# Altium PCB stm32h755xih3.PcbDoc
Units mm, origin at the board's own origin, x right, y up, seen from the top; angles counter-clockwise.
Board outline 152.4 x 101.6 mm, 20 copper layers (F.Cu, F.Mask, B.Cu, B.Mask, In1.Cu, F.SilkS, In2.Cu, B.SilkS, F.Adhes, B.Adhes, F.Paste, B.Paste, Dwgs.User, Cmts.User, Eco1.User, Eco2.User, Edge.Cuts, Margin, B.CrtYd, F.CrtYd); 69 components, 203 nets, 432 pads, 74 vias.
Unrouted connection lines stored in the file: 83.
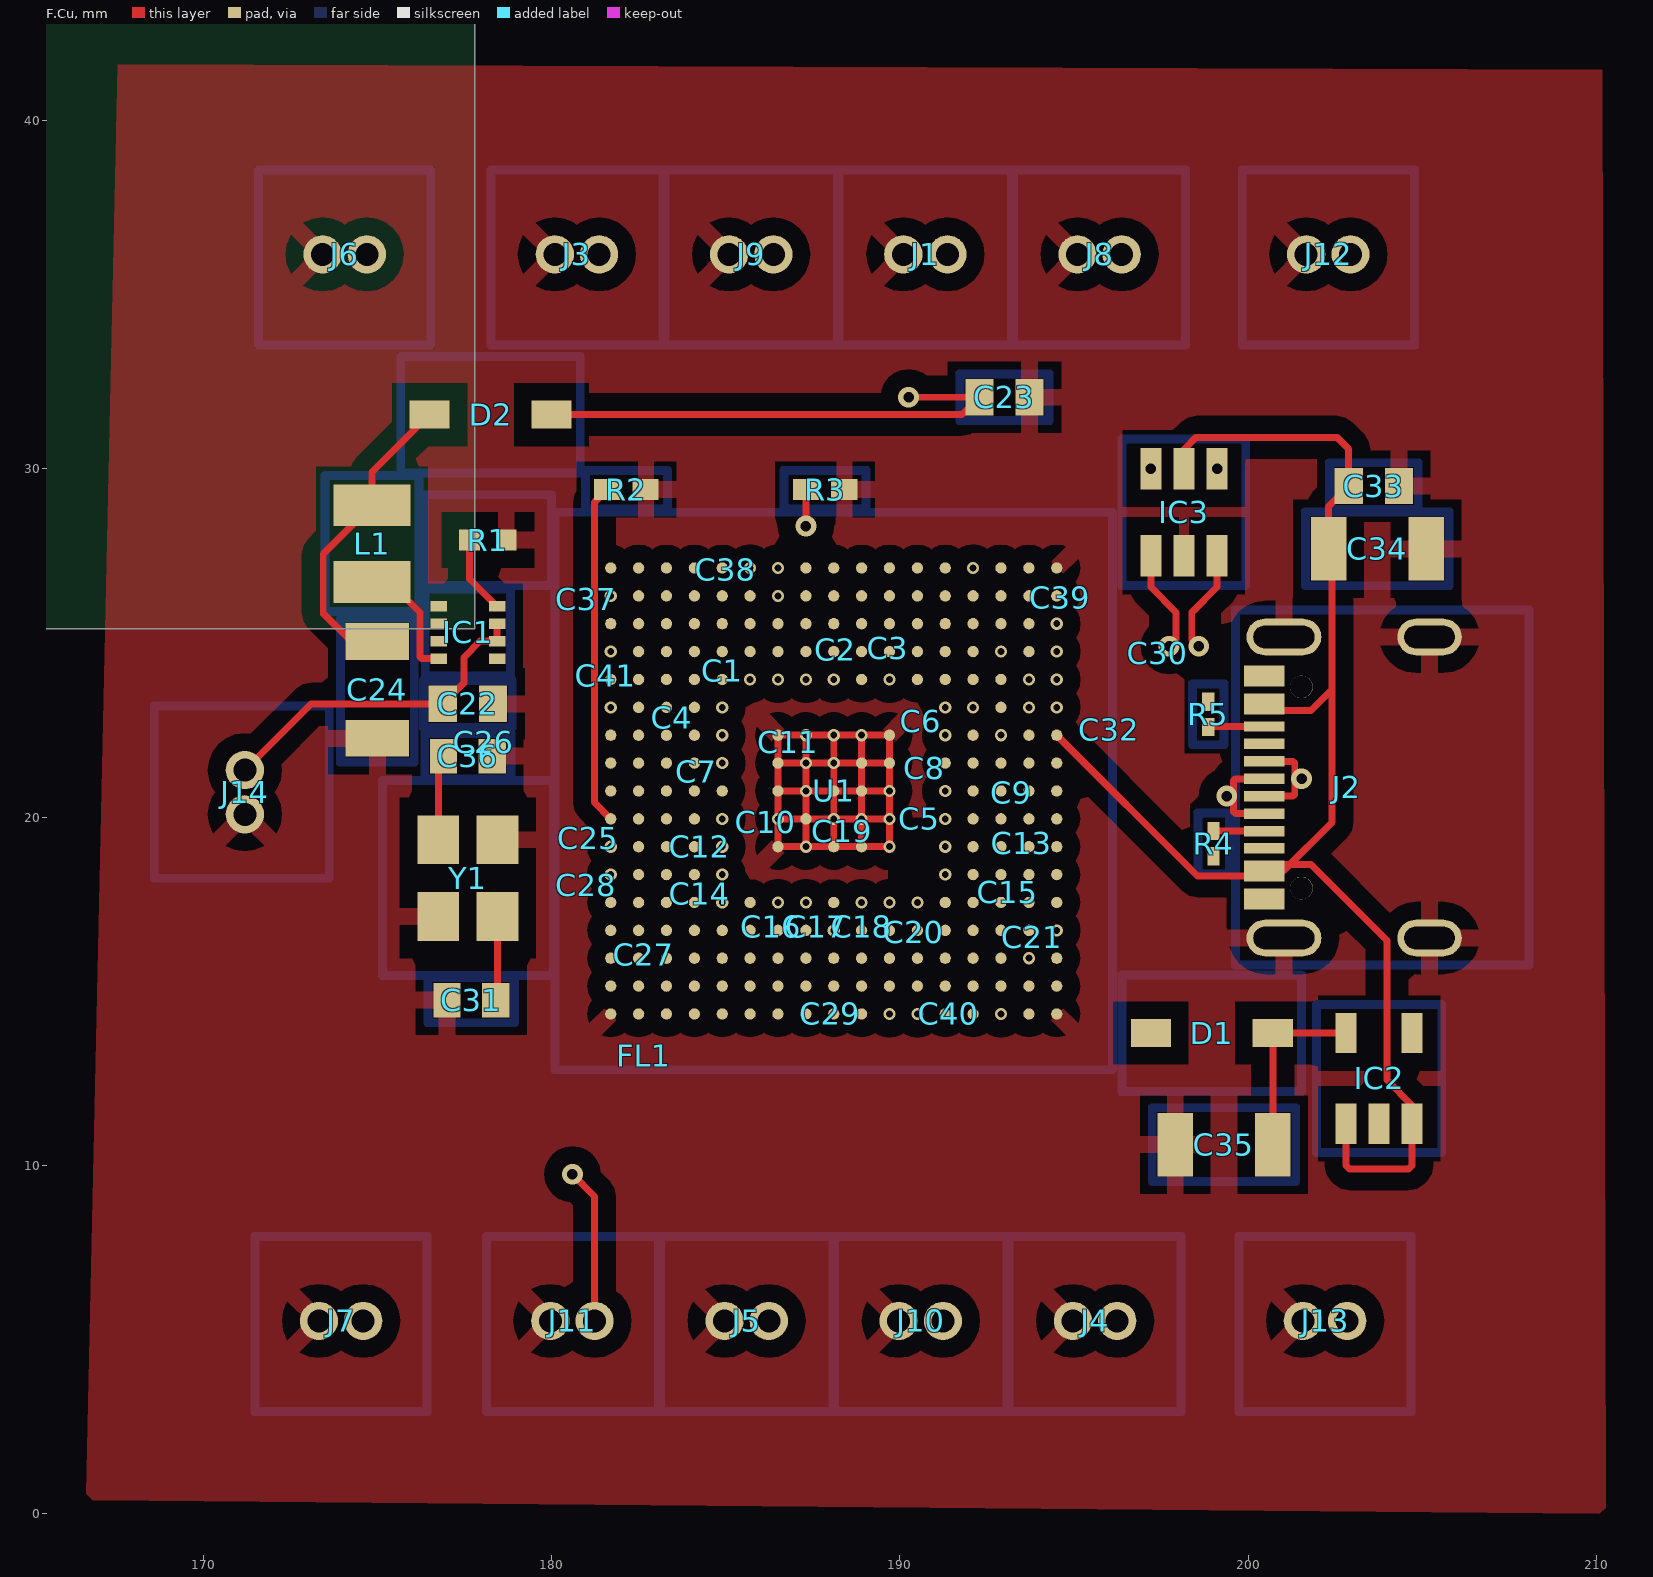
[diagram p0: F.Cu view]
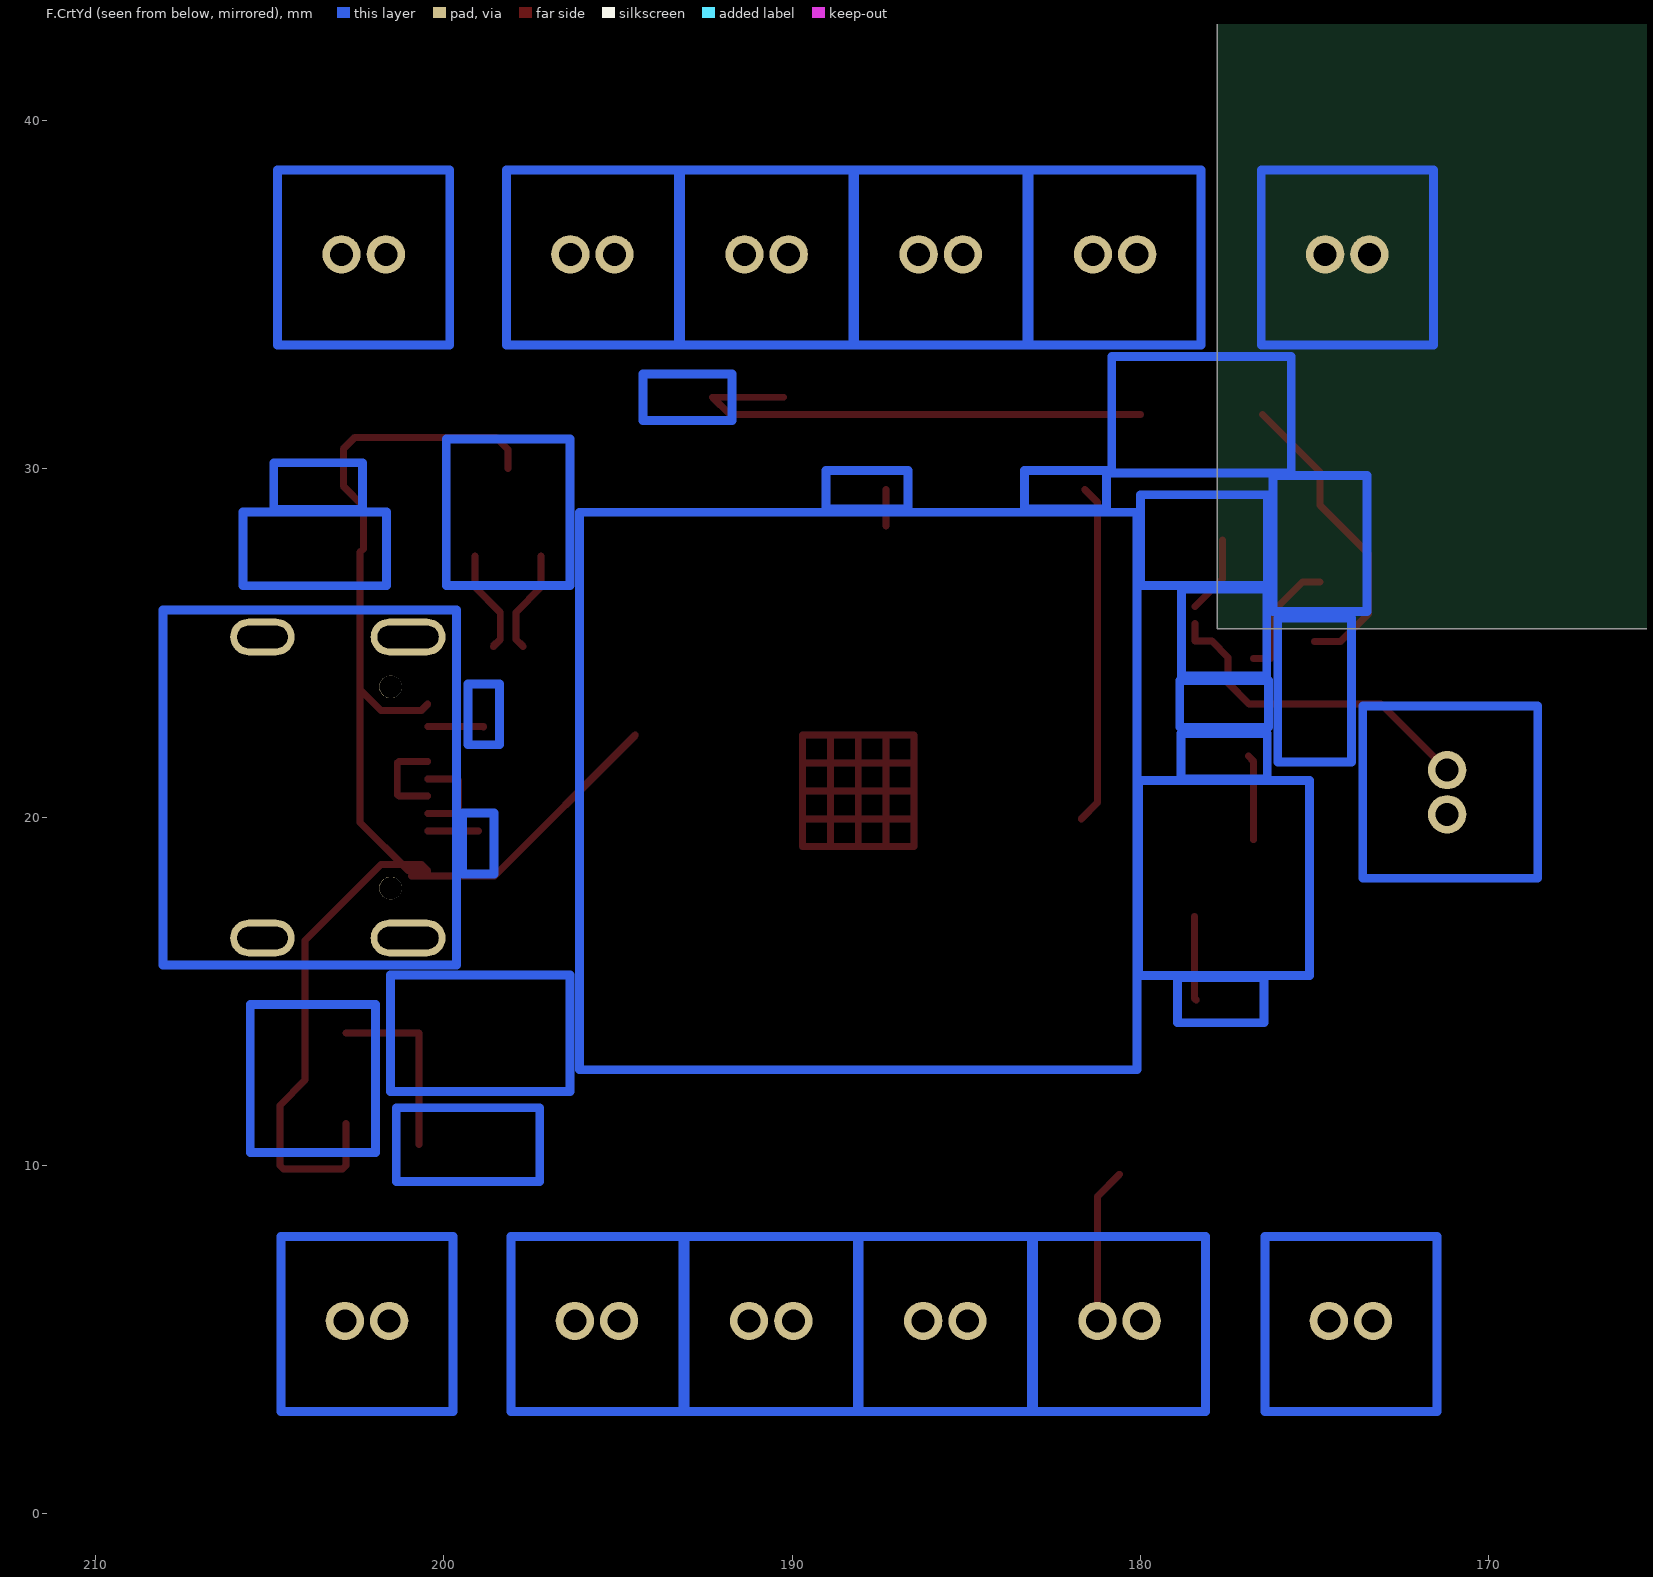
[diagram p1: F.CrtYd view, seen from below]
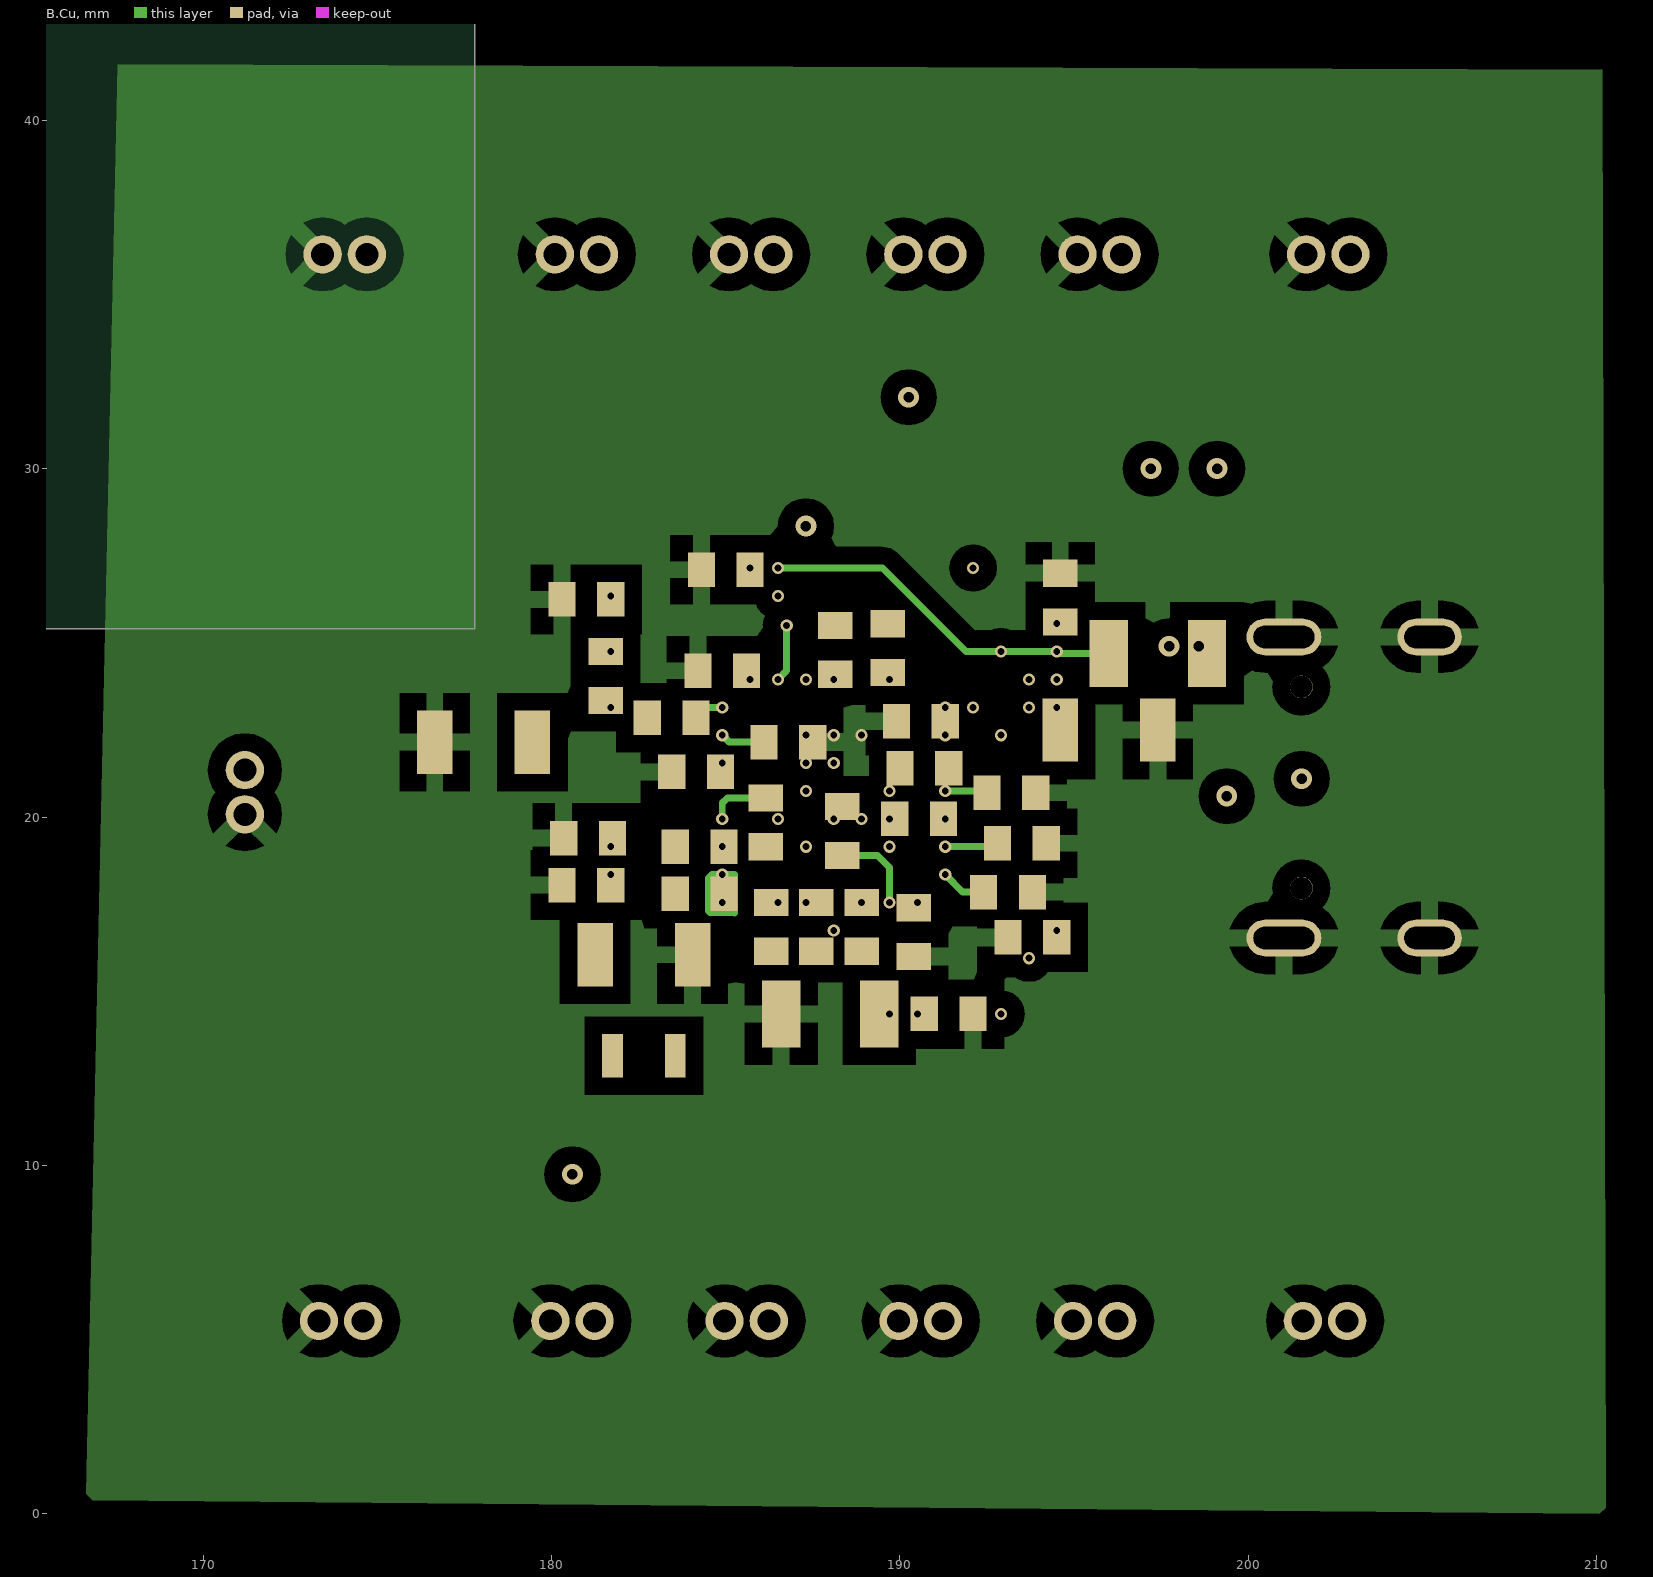
[diagram p2: B.Cu]
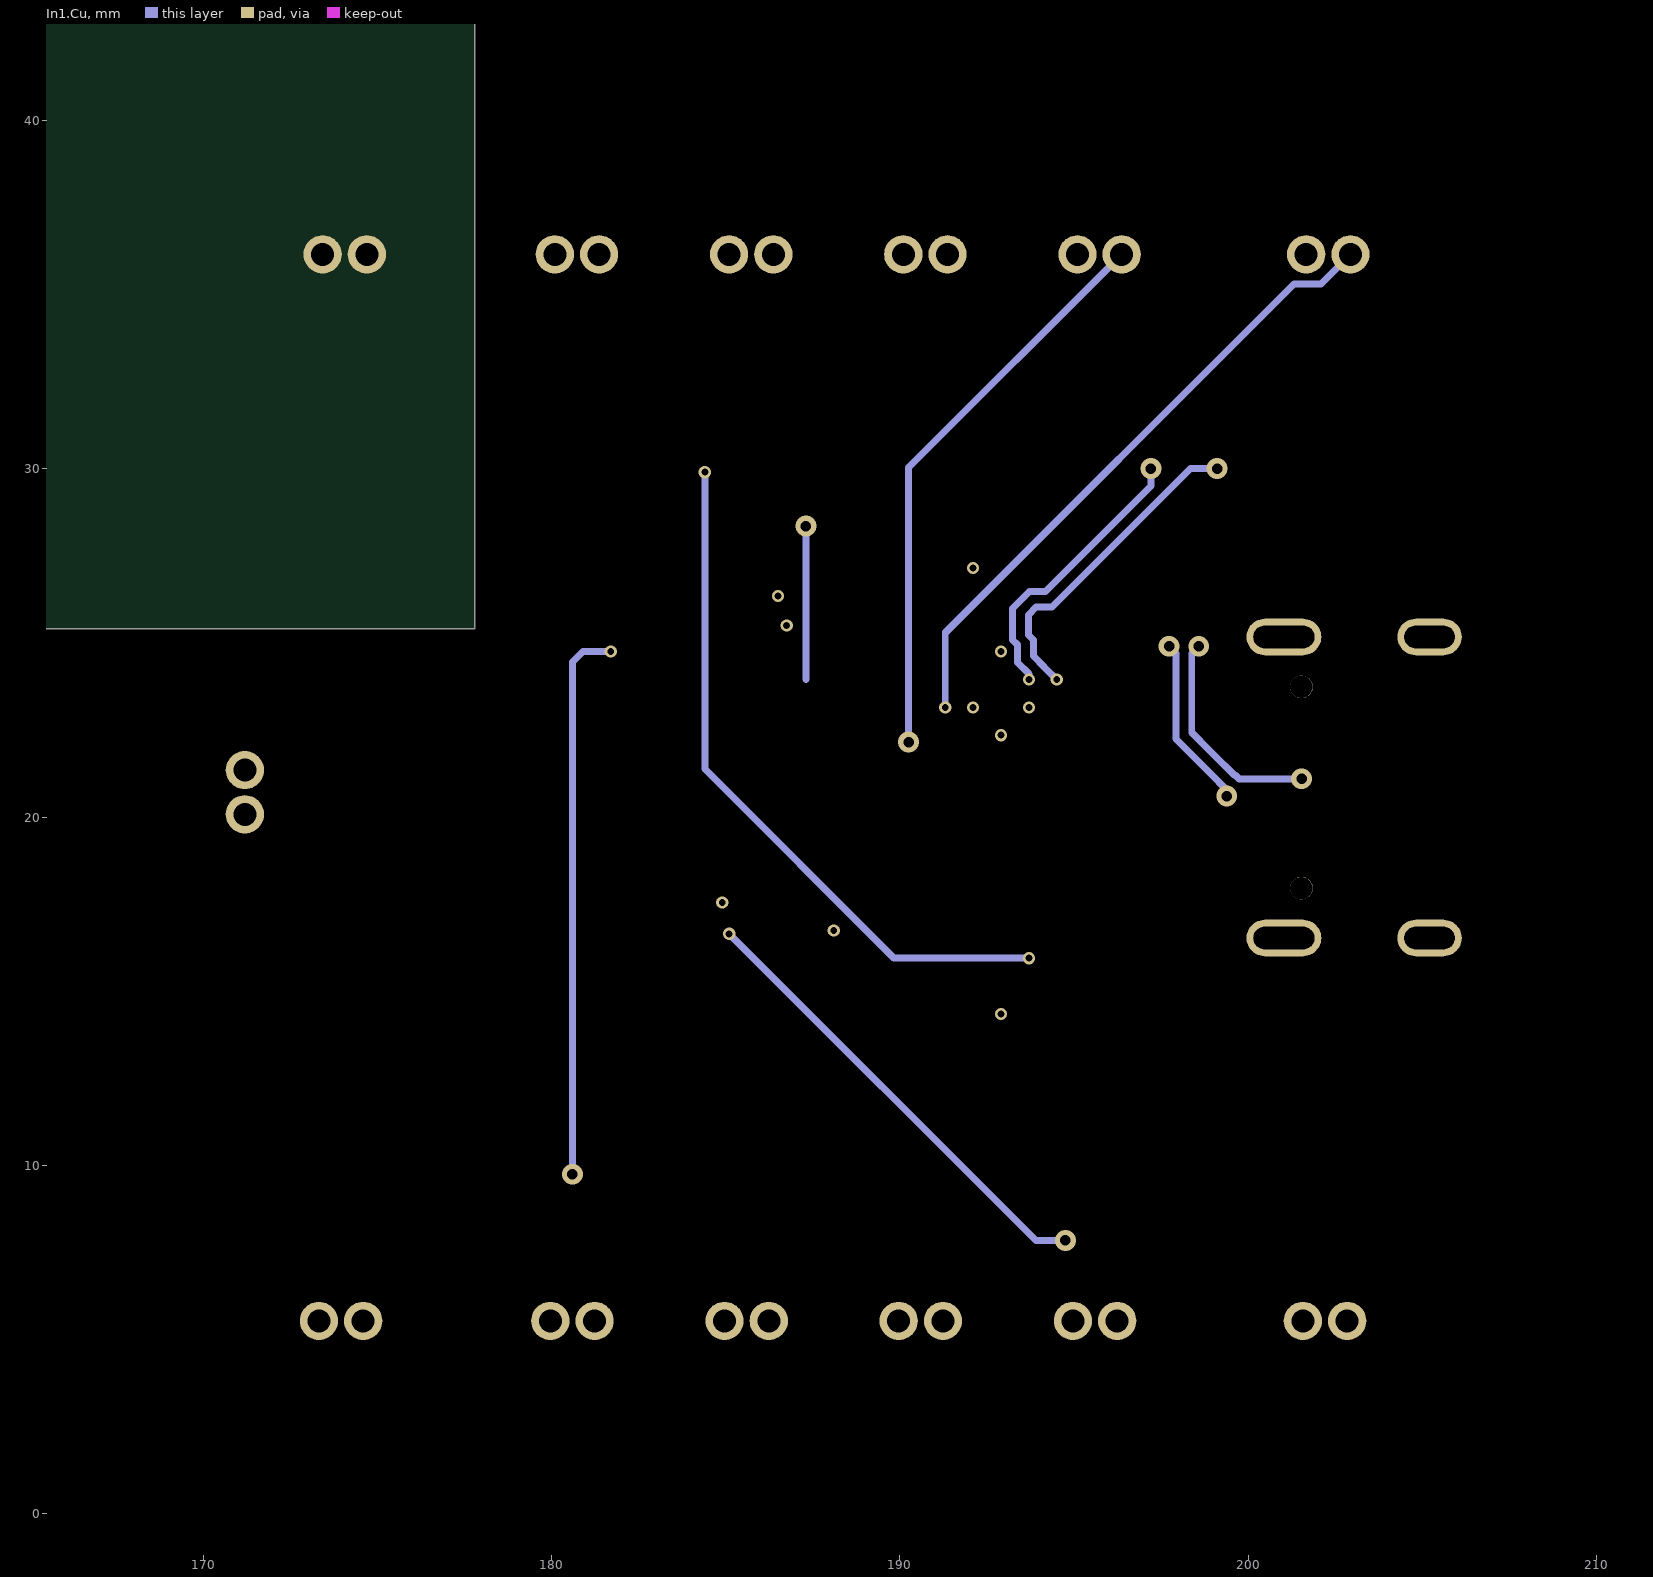
[diagram p3: In1.Cu]
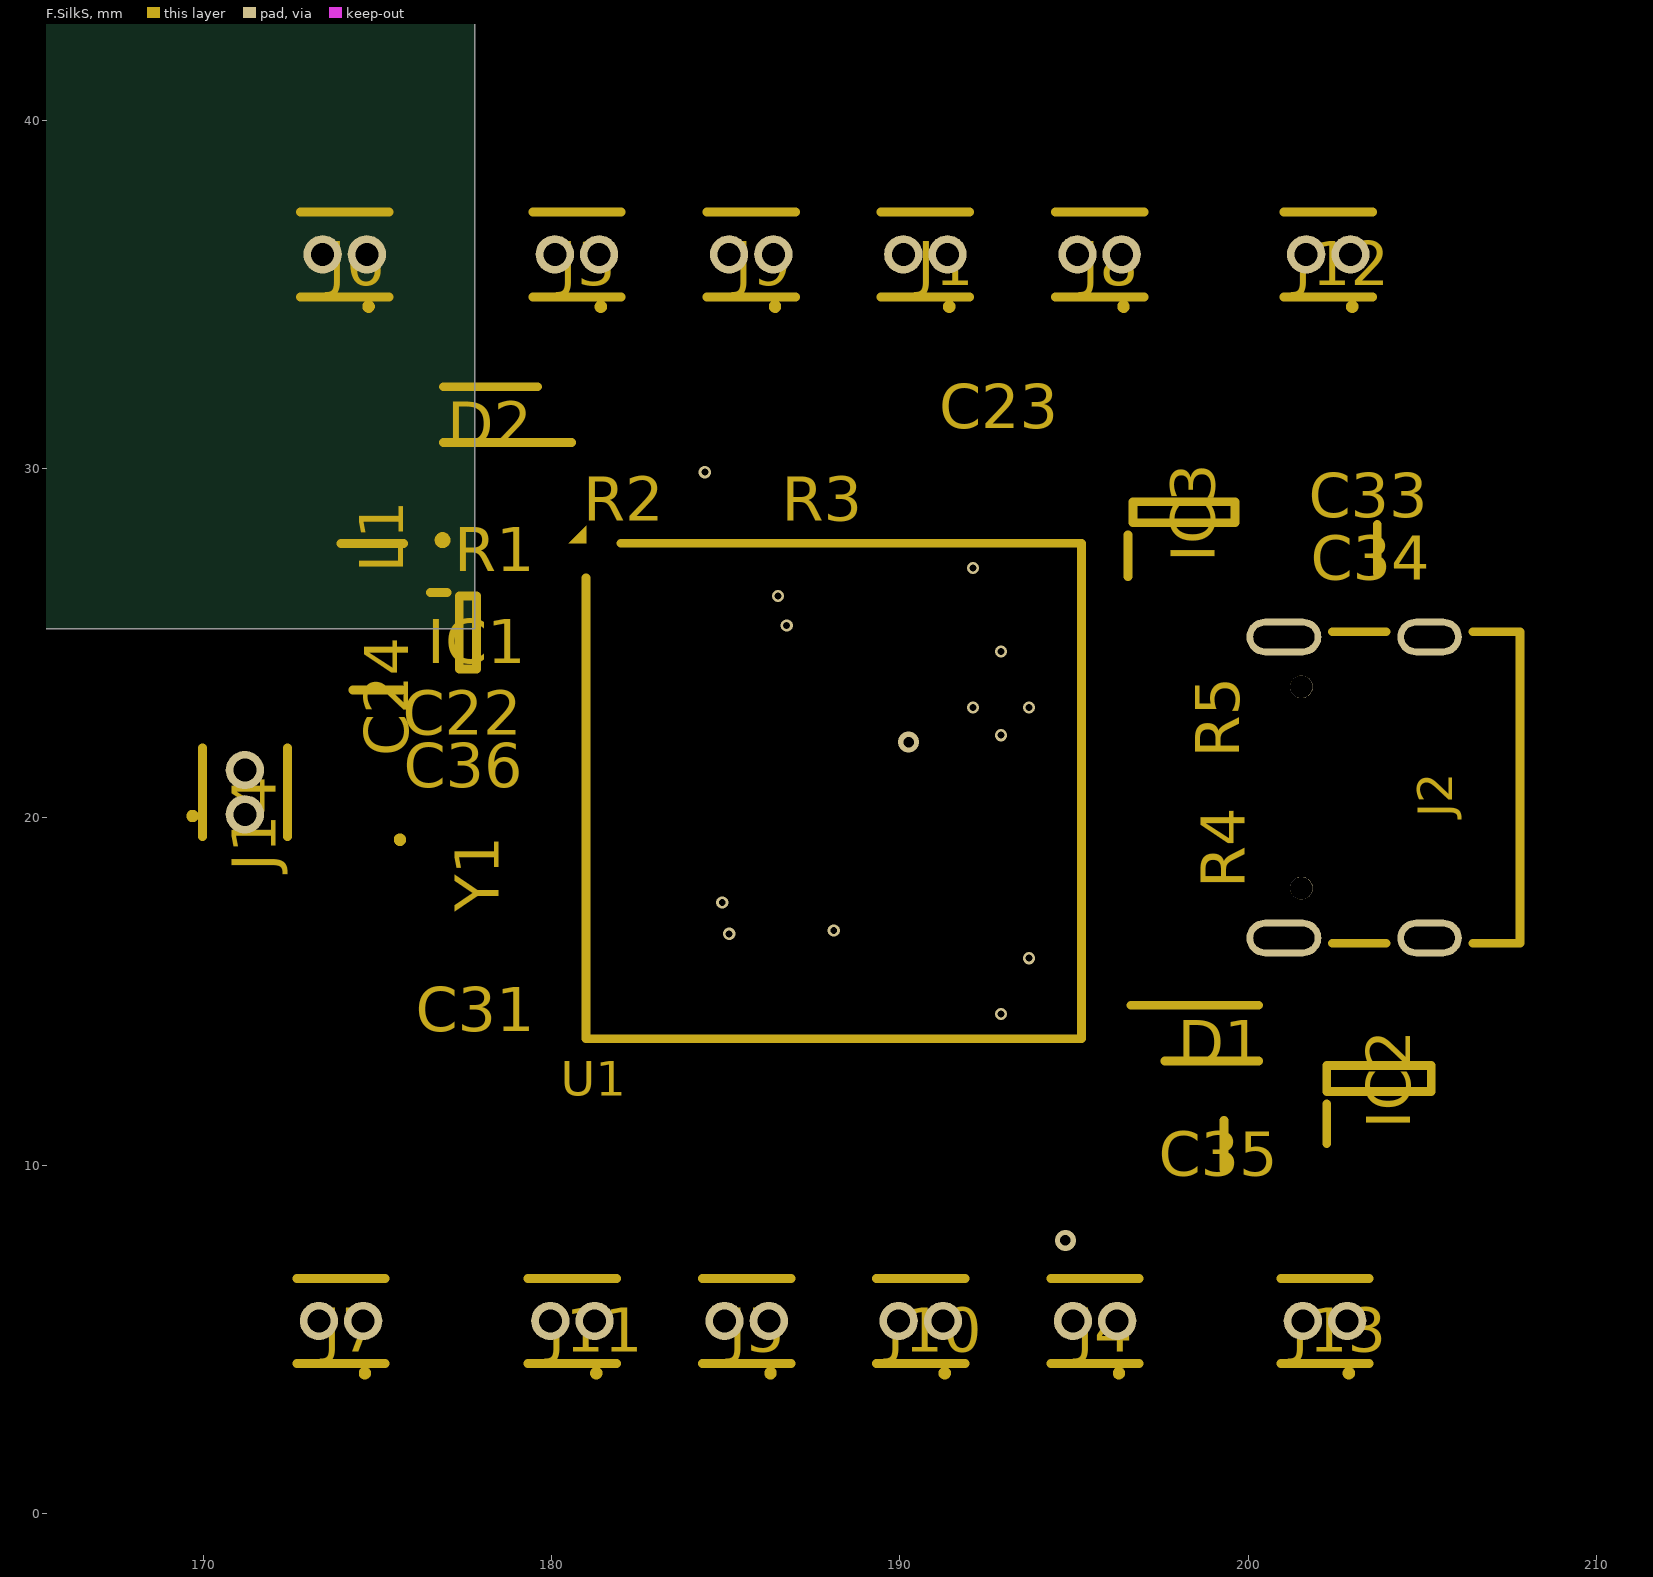
[diagram p4: F.SilkS]
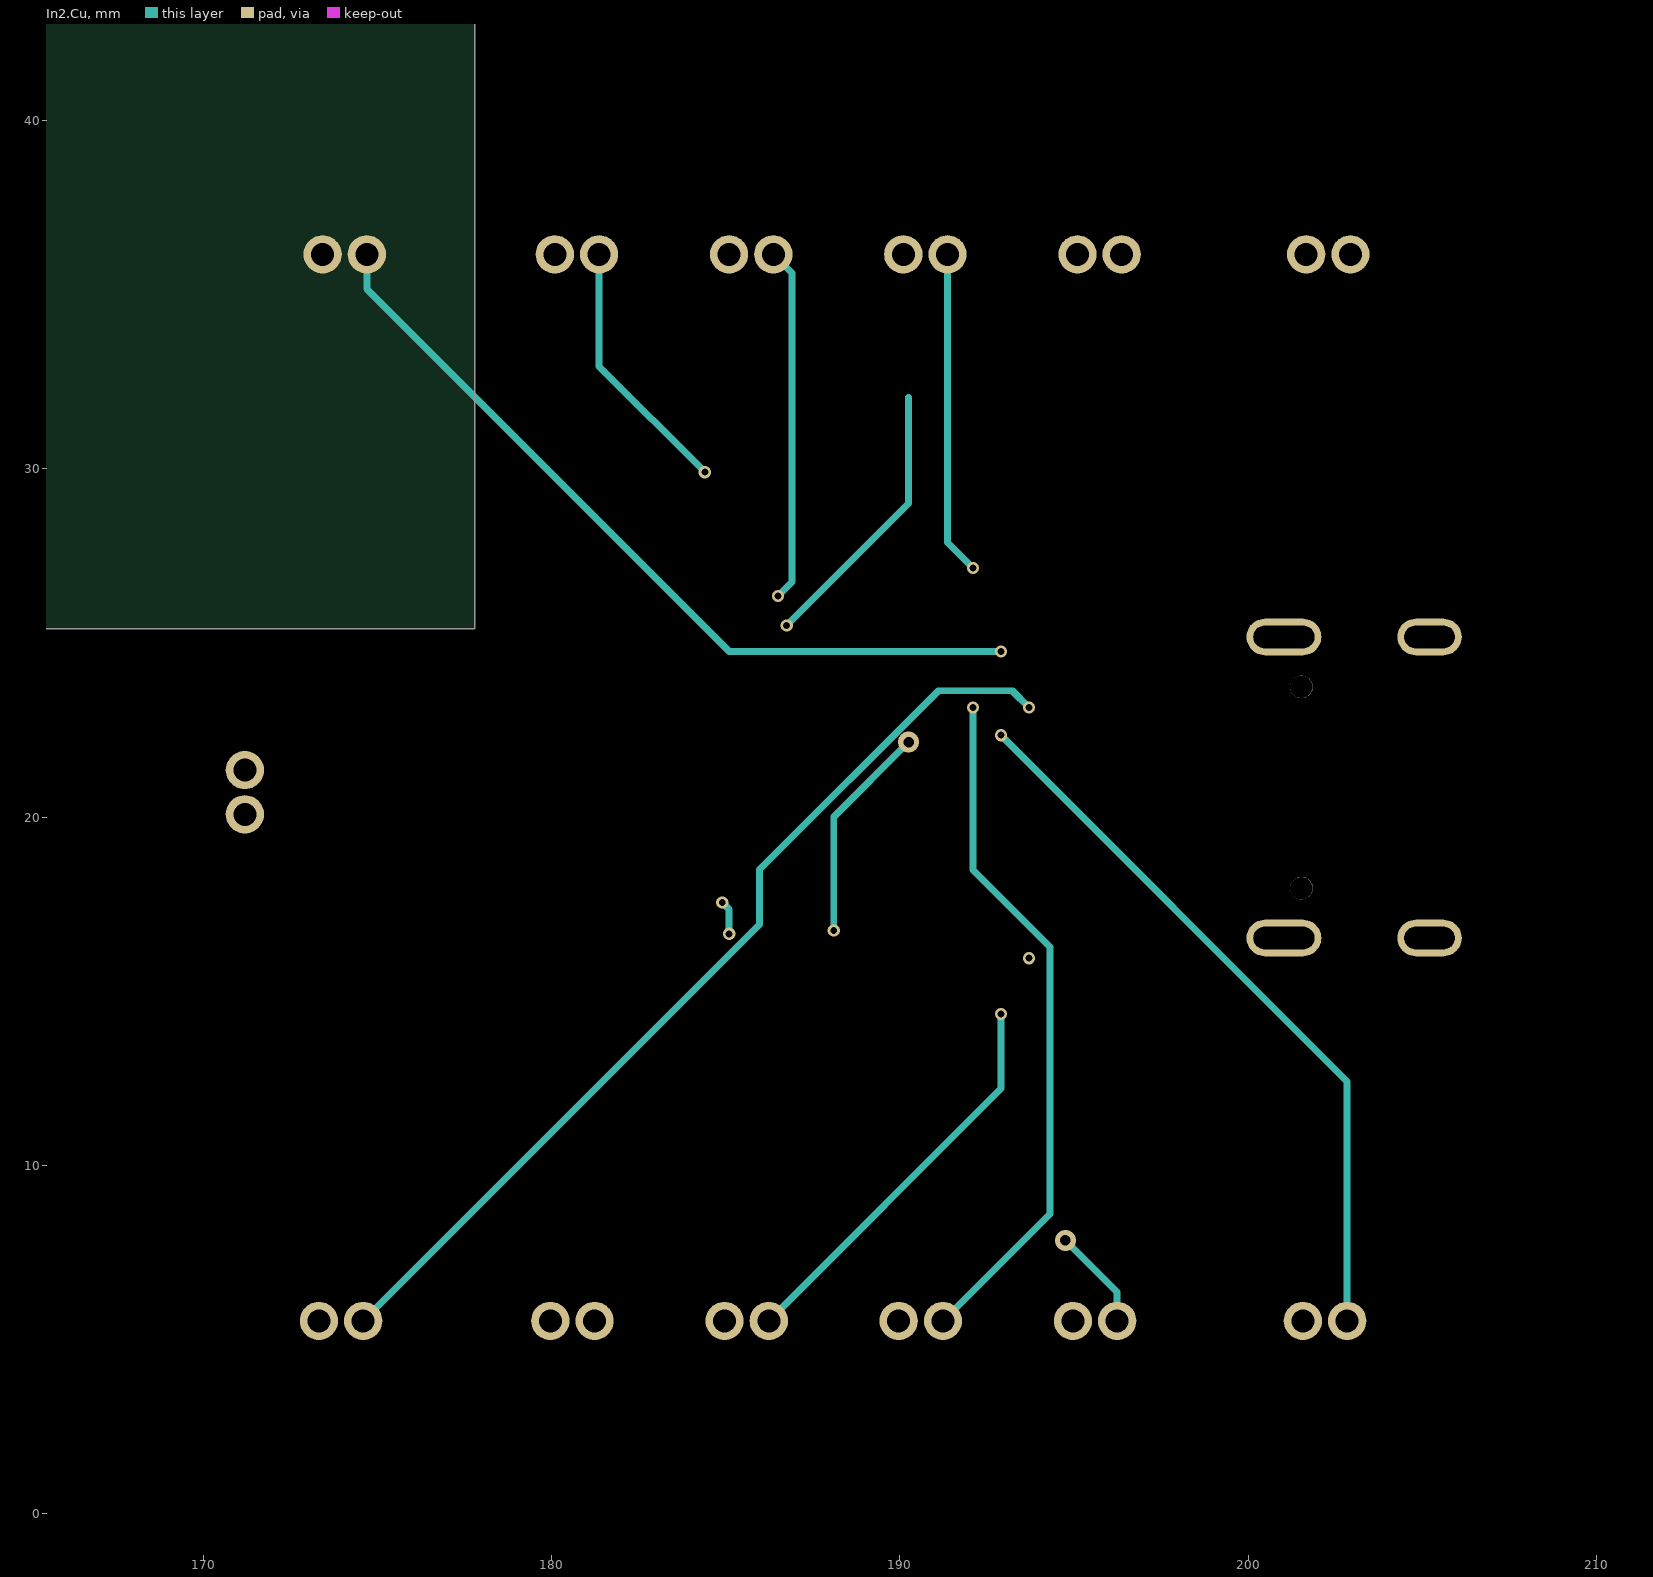
[diagram p5: In2.Cu]
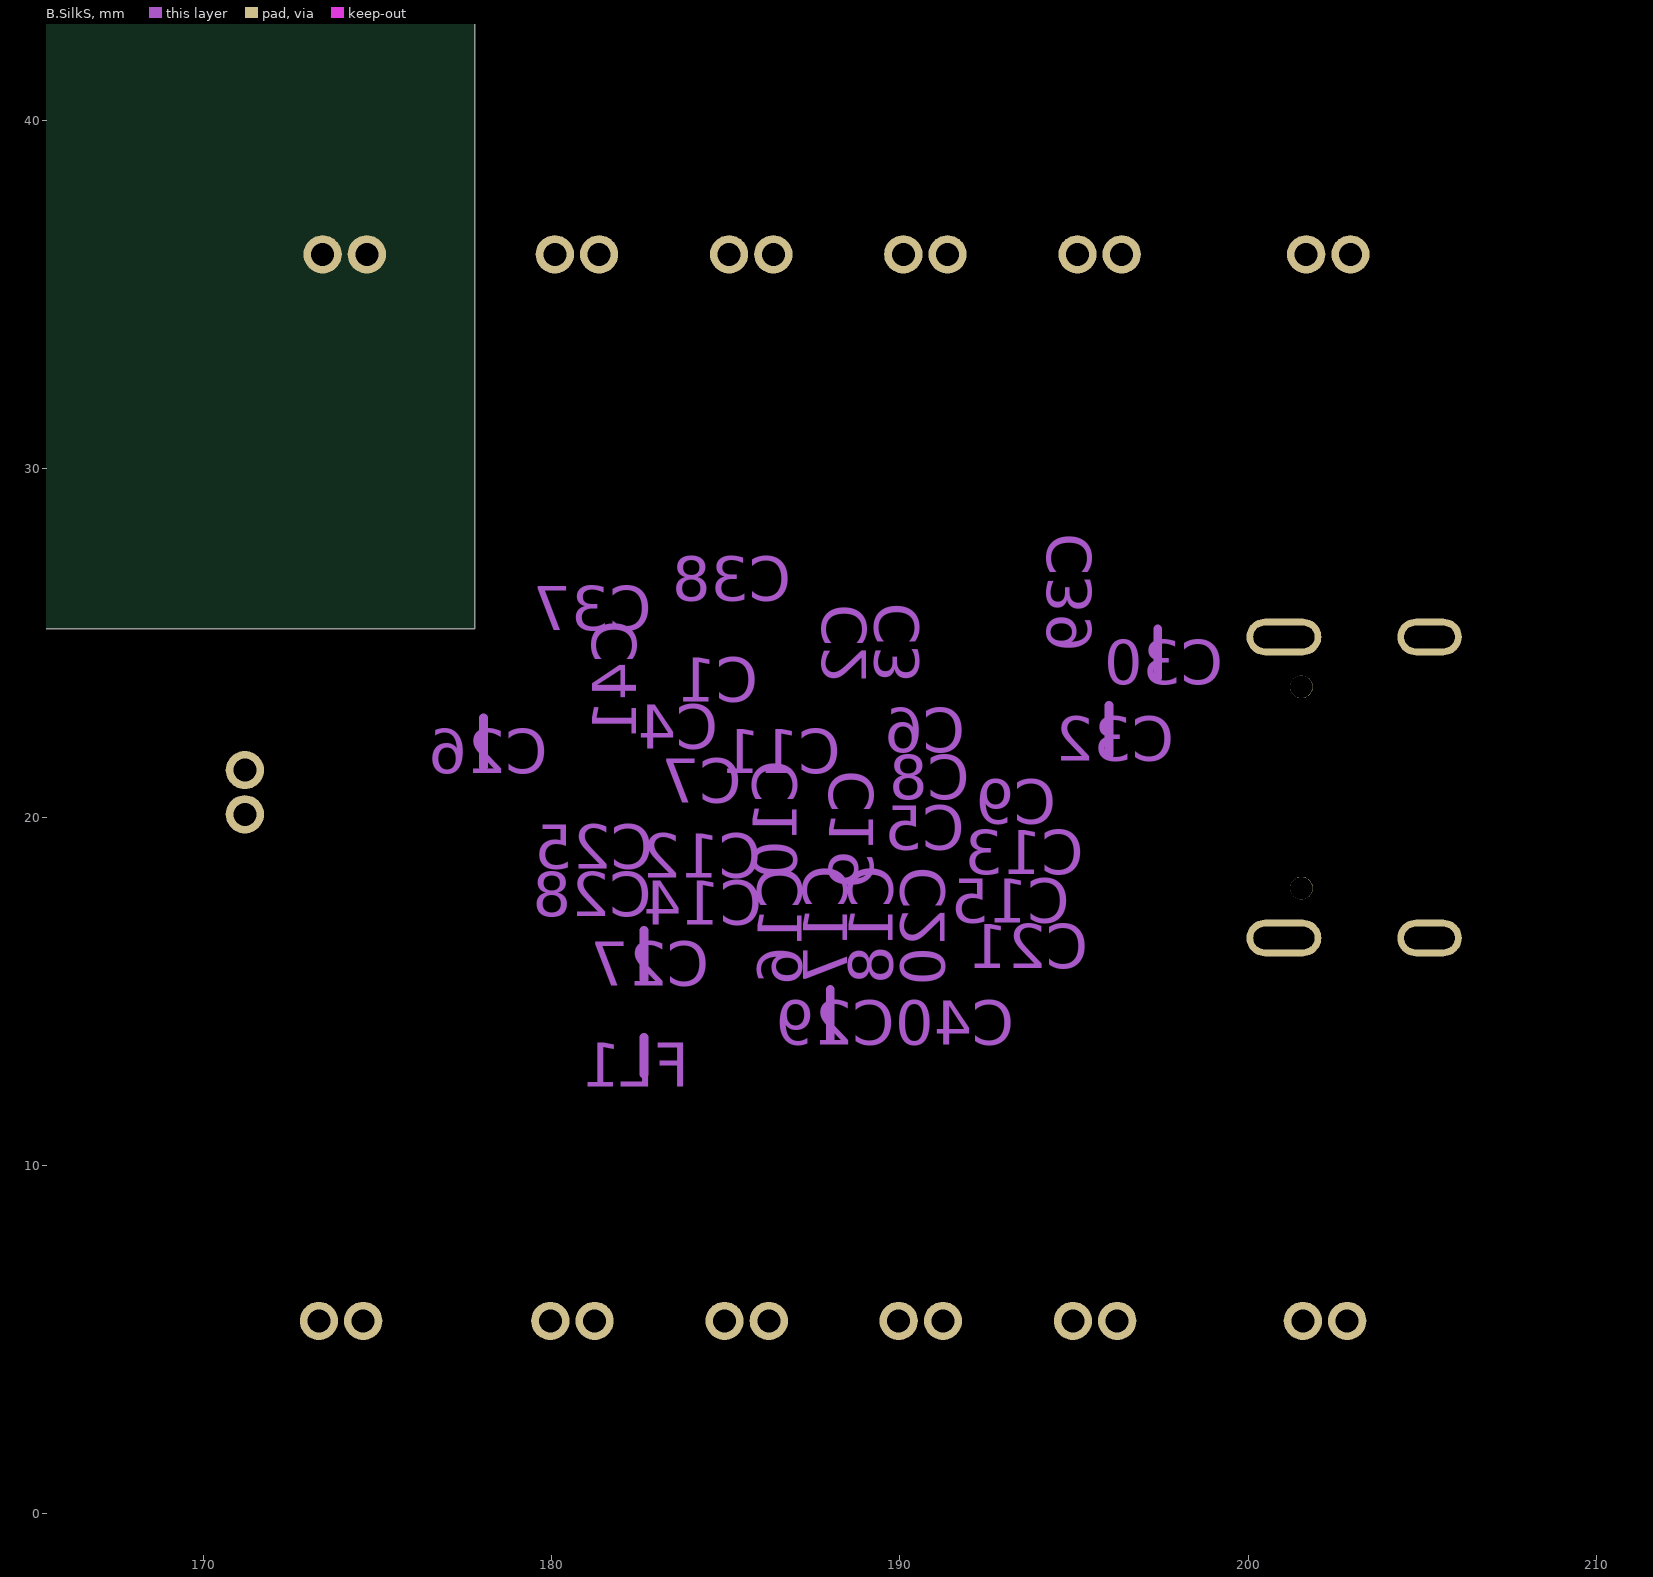
[diagram p6: B.SilkS]
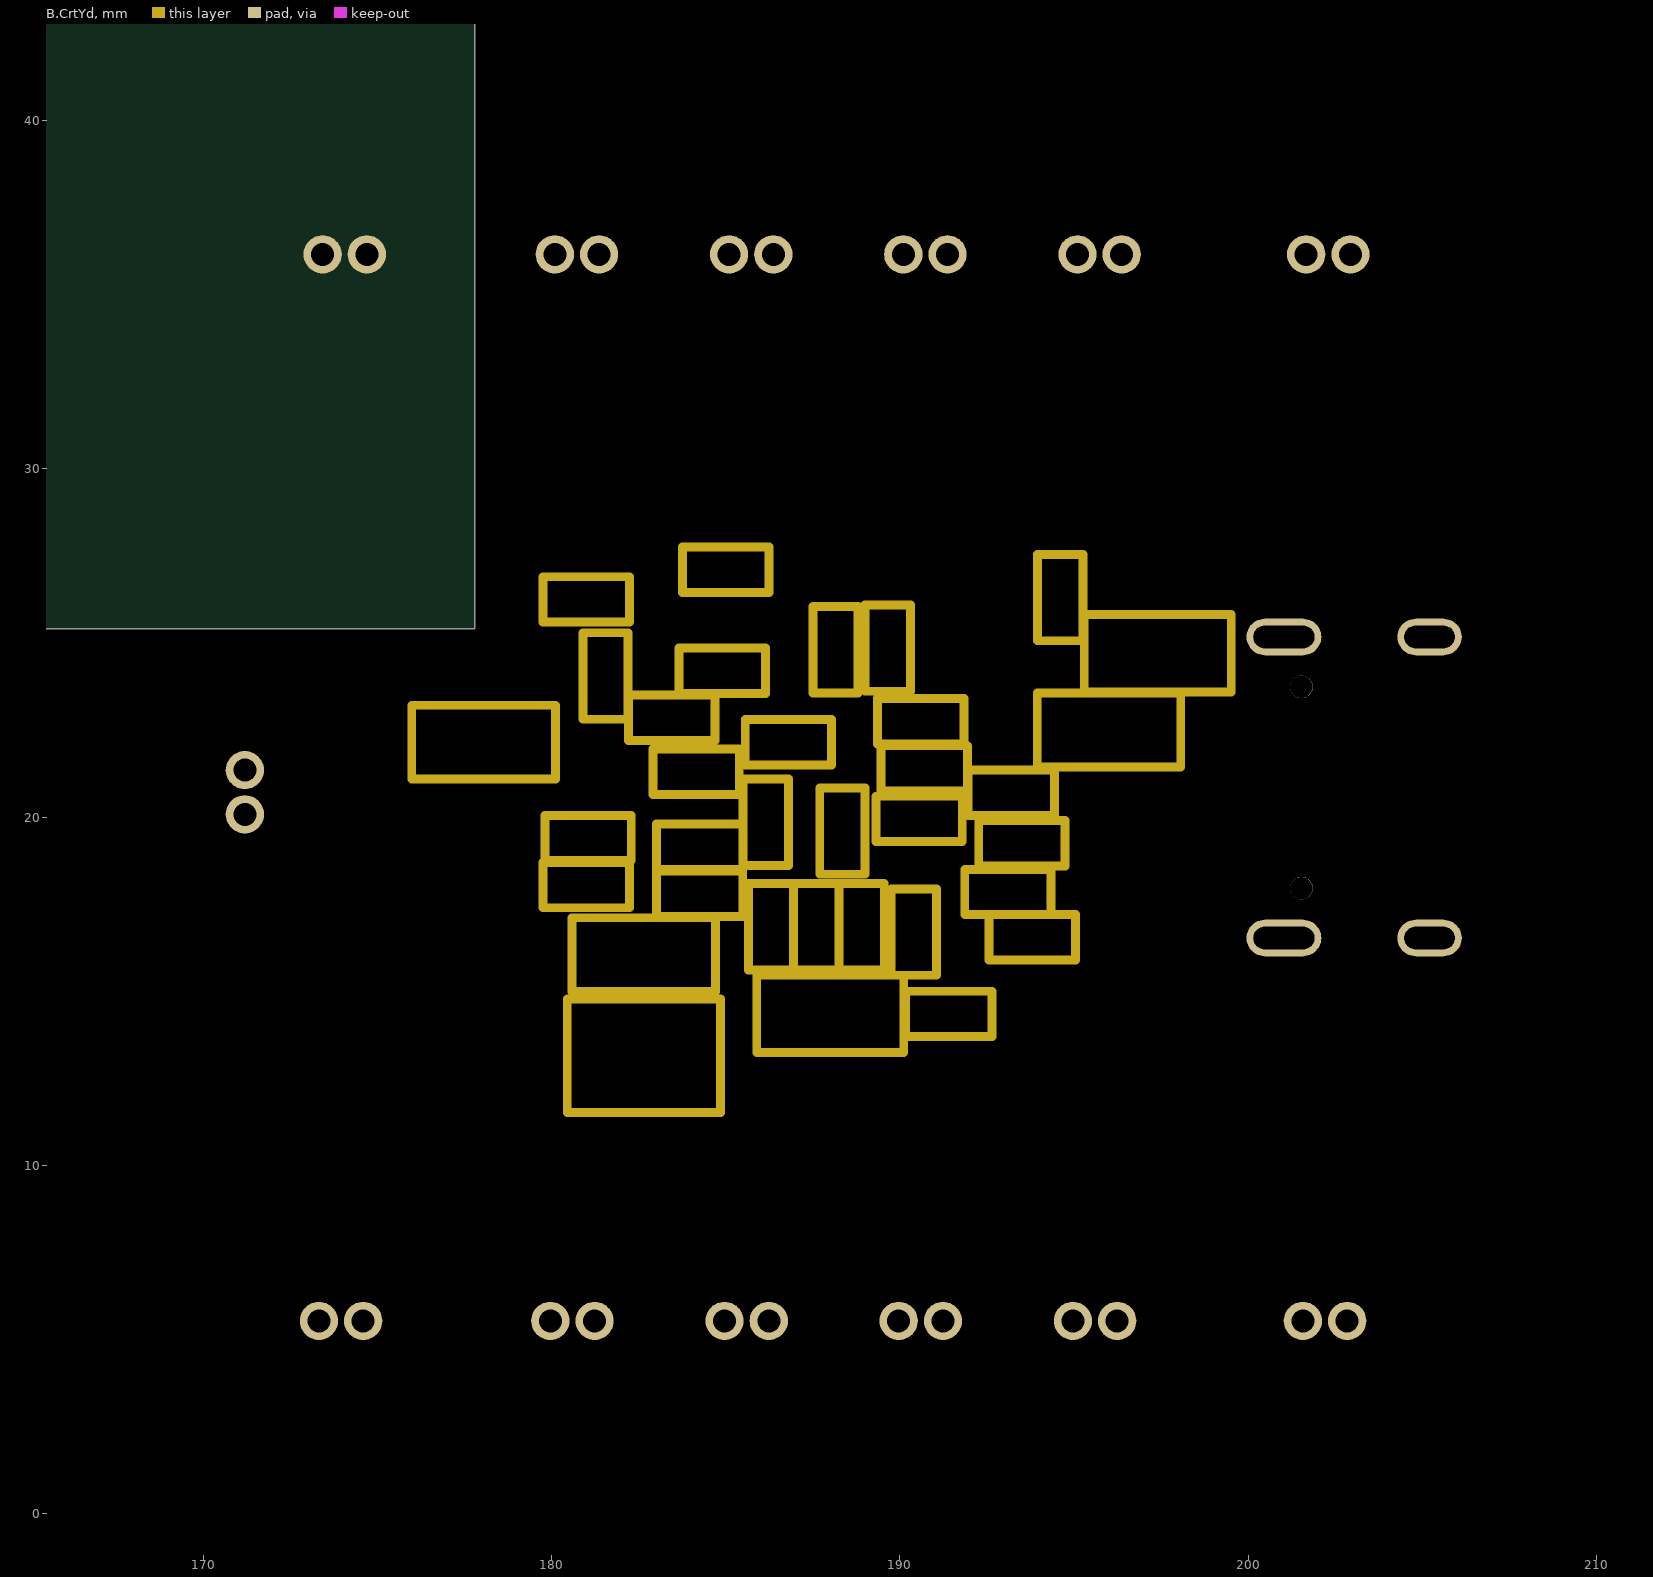
[diagram p7: B.CrtYd]

## Layer stack, top to bottom
Top Solder: solder mask 0.0102, Solder Resist, Dk 3.5
F.Cu: signal copper 0.0356
Dielectric 1: dielectric 0.32, FR-4, Dk 4.8
F.Mask: signal copper 0.0356
Dielectric2: dielectric 0.32, FR-4, Dk 4.8
B.Cu: signal copper 0.0356
Dielectric3: dielectric 0.32, FR-4, Dk 4.8
B.Mask: signal copper 0.0356
Dielectric4: dielectric 0.32, FR-4, Dk 4.8
In1.Cu: signal copper 0.0356
Dielectric5: dielectric 0.32, FR-4, Dk 4.8
F.SilkS: signal copper 0.0356
Dielectric6: dielectric 0.32, FR-4, Dk 4.8
In2.Cu: signal copper 0.0356
Dielectric7: dielectric 0.32, FR-4, Dk 4.8
B.SilkS: signal copper 0.0356
Dielectric8: dielectric 0.32, FR-4, Dk 4.8
F.Adhes: signal copper 0.0356
Dielectric9: dielectric 0.32, FR-4, Dk 4.8
B.Adhes: signal copper 0.0356
Dielectric10: dielectric 0.32, FR-4, Dk 4.8
F.Paste: signal copper 0.0356
Dielectric11: dielectric 0.32, FR-4, Dk 4.8
B.Paste: signal copper 0.0356
Dielectric12: dielectric 0.32, FR-4, Dk 4.8
Dwgs.User: signal copper 0.0356
Dielectric13: dielectric 0.32, FR-4, Dk 4.8
Cmts.User: signal copper 0.0356
Dielectric14: dielectric 0.32, FR-4, Dk 4.8
Eco1.User: signal copper 0.0356
Dielectric15: dielectric 0.32, FR-4, Dk 4.8
Eco2.User: signal copper 0.0356
Dielectric16: dielectric 0.32, FR-4, Dk 4.8
Edge.Cuts: signal copper 0.0356
Dielectric17: dielectric 0.32, FR-4, Dk 4.8
Margin: signal copper 0.0356
Dielectric18: dielectric 0.32, FR-4, Dk 4.8
B.CrtYd: signal copper 0.0356
Dielectric19: dielectric 0.32, FR-4, Dk 4.8
F.CrtYd: signal copper 0.0356
Bottom Solder: solder mask 0.0102, Solder Resist, Dk 3.5

## Board outline
25.4,25.4 177.8,25.4 177.8,127 25.4,127

## Design rules (kind name [scope] priority, off if disabled: settings)
Clearance "Clearence 0.5_Polygon" [InNamedPolygon('F.Cu-GND') OR InNamedPolygon('B.Cu-GND')] p1: gap=0.5 ignorepadtopadclearanceinfootprint=FALSE
MinimumSolderMaskSliver [All] p1: minsoldermaskwidth=0
PolygonConnect Polygon_B.Cu-GND_ConnectDirect [IsNamedPolygon('B.Cu-GND') vs IsVia] p1: connectstyle=Direct reliefconductorwidth=0.254 reliefentries=4 polygonreliefangle="90 Angle" airgapwidth=0.254
PolygonConnect Polygon_B.Cu-GND_ConnectRelief45 [IsNamedPolygon('B.Cu-GND') vs (IsThruPin or IsSMTPin) and (PadShape_AllLayers = 'Round')] p2: connectstyle=Relief reliefconductorwidth=0.5 reliefentries=4 polygonreliefangle="45 Angle" airgapwidth=0.5
PolygonConnect Polygon_B.Cu-GND_ConnectRelief90 [IsNamedPolygon('B.Cu-GND') vs (IsThruPin or IsSMTPin) and (PadShape_AllLayers <> 'Round')] p3: connectstyle=Relief reliefconductorwidth=0.5 reliefentries=4 polygonreliefangle="90 Angle" airgapwidth=0.5
PolygonConnect Polygon_F.Cu-GND_ConnectDirect [IsNamedPolygon('F.Cu-GND') vs IsVia] p4: connectstyle=Direct reliefconductorwidth=0.254 reliefentries=4 polygonreliefangle="90 Angle" airgapwidth=0.254
PolygonConnect Polygon_F.Cu-GND_ConnectRelief45 [IsNamedPolygon('F.Cu-GND') vs (IsThruPin or IsSMTPin) and (PadShape_AllLayers = 'Round')] p5: connectstyle=Relief reliefconductorwidth=0.5 reliefentries=4 polygonreliefangle="45 Angle" airgapwidth=0.5
PolygonConnect Polygon_F.Cu-GND_ConnectRelief90 [IsNamedPolygon('F.Cu-GND') vs (IsThruPin or IsSMTPin) and (PadShape_AllLayers <> 'Round')] p6: connectstyle=Relief reliefconductorwidth=0.5 reliefentries=4 polygonreliefangle="90 Angle" airgapwidth=0.5
RoutingVias [All] p1: holewidth=0.711 width=1.27 viastyle="Through Hole" minholewidth=0.711 minwidth=1.27 maxholewidth=0.711 maxwidth=1.27
SilkToSilkClearance [All] p1: silktosilkclearance=0
SilkToSolderMaskClearance [IsPad] p1: minsilkscreentomaskgap=0 clearancetoexposedcopper=TRUE
SolderMaskExpansion [All] p1: expansion=0.102 istentingtop=FALSE
Width [All] p1: maxlimit=10 minlimit=0.254 preferedwidth=0.254 midlayer1_maxwidth=0.254 midlayer3_maxwidth=0.254 midlayer9_maxwidth=0.254 midlayer11_maxwidth=0.254 midlayer13_maxwidth=0.254 midlayer15_maxwidth=0.254 midlayer17_maxwidth=0.254 midlayer19_maxwidth=0.254 midlayer21_maxwidth=0.254 midlayer23_maxwidth=0.254 midlayer25_maxwidth=0.254 midlayer27_maxwidth=0.254 minimp=50.000000 maximp=50.000000 favimp=50.000000
27 further rules are at their usual default settings.

## Components (designator, comment, footprint, x,y, rotation, side; value= is the part's Value field where it differs from the comment)
C1 "Comment" CAPC1608X90N#1 184.9,24.2 r180 top value=CC0603JRX7R9BB104
C2 "Comment" CAPC1608X90N#1 188.15,24.8 r90 top value=CC0603JRX7R9BB104
C3 "Comment" CAPC1608X90N#1 189.65,24.85 r90 top value=CC0603JRX7R9BB104
C4 "Comment" CAPC1608X90N#1 183.45,22.85 r180 top value=CC0603JRX7R9BB104
C5 "Comment" CAPC1608X90N#1 190.55,19.95 r180 top value=CC0603JRX7R9BB104
C6 "Comment" CAPC1608X90N#1 190.6,22.75 r180 top value=CC0603JRX7R9BB104
C7 "Comment" CAPC1608X90N#1 184.15,21.3 r180 top value=CC0603JRX7R9BB104
C8 "Comment" CAPC1608X90N#1 190.7,21.4 r180 top value=CC0603JRX7R9BB104
C9 "Comment" CAPC1608X90N#1 193.2,20.7 r0 top value=CC0603JRX7R9BB104
C10 "Comment" CAPC1608X90N#1 186.15,19.85 r270 top value=CC0603JRX7R9BB104
C11 "Comment" CAPC1608X90N#1 186.8,22.15 r0 top value=CC0603JRX7R9BB104
C12 "Comment" CAPC1608X90N#1 184.25,19.15 r180 top value=CC0603JRX7R9BB104
C13 "Comment" CAPC1608X90N#1 193.5,19.25 r0 top value=CC0603JRX7R9BB104
C14 "Comment" CAPC1608X90N#1 184.25,17.8 r180 top value=CC0603JRX7R9BB104
C15 "Comment" CAPC1608X90N#1 193.1,17.85 r0 top value=CC0603JRX7R9BB104
C16 "Comment" CAPC1608X90N#1 186.3,16.85 r270 top value=CC0603JRX7R9BB104
C17 "Comment" CAPC1608X90N#1 187.6,16.85 r270 top value=CC0603JRX7R9BB104
C18 "Comment" CAPC1608X90N#1 188.9,16.85 r270 top value=CC0603JRX7R9BB104
C19 "Comment" CAPC1608X90N#1 188.35,19.6 r90 top value=CC0603JRX7R9BB104
C20 "Comment" CAPC1608X90N#1 190.4,16.7 r270 top value=CC0603JRX7R9BB104
C21 "Comment" CAPC1608X90N#1 193.8,16.55 r180 top value=CC0603JRX7R9BB104
C22 "Comment" CAPC1709X100N 177.6,23.25 r0 top value=MLASG168BB5475KTNA01
C23 "Comment" CAPC1709X100N 193,32.05 r0 top value=MLASG168BB5475KTNA01
C24 "Comment" CAPC3216X95N 175,23.65 r270 top value=CL31A226KOCLNNC
C25 "Comment" CAPC1608X90N#1 181.05,19.4 r180 top value=CC0603JRX7R9BB104
C26 "Comment" CAPC3216X190N#1 178.05,22.15 r180 top value=KGM31HR71C105JU
C27 "Comment" CAPC3216X190N#1 182.65,16.05 r0 top value=KGM31HR71C105JU
C28 "Comment" CAPC1608X90N#1 181,18.05 r180 top value=CC0603JRX7R9BB104
C29 "Comment" CAPC3216X229N 188,14.35 r180 top value=12065C225JAT2A
C30 "Comment" CAPC3216X229N 197.4,24.7 r0 top value=12065C225JAT2A
C31 "Comment" CAPC1608X90N#2 177.7,14.75 r180 top value=06035C3R9CAT2A
C32 "Comment" CAPC3216X190N#1 196,22.5 r0 top value=KGM31HR71C105JU
C33 "Comment" CAPC1709X100N 203.6,29.5 r0 top value=MLASG168BB5475KTNA01
C34 "Comment" CAPC3216X190N#2 203.7,27.7 r0 top value=KGM31HR71C105JU
C35 "Comment" CAPC3216X190N#2 199.3,10.6 r180 top value=KGM31HR71C105JU
C36 "Comment" CAPC1608X90N#2 177.6,21.75 r0 top value=06035C3R9CAT2A
C37 "Comment" CAPC1608X90N#1 181,26.25 r180 top value=CC0603JRX7R9BB104
C38 "Comment" CAPC1608X90N#1 185,27.1 r180 top value=CC0603JRX7R9BB104
C39 "Comment" CAPC1608X90N#1 194.6,26.3 r90 top value=CC0603JRX7R9BB104
C40 "Comment" CAPC1608X90N#1 191.4,14.35 r0 top value=CC0603JRX7R9BB104
C41 "Comment" CAPC1608X90N#1 181.55,24.05 r90 top value=CC0603JRX7R9BB104
D1 "Comment" SOD3716X135N 198.95,13.8 r0 top value=MBR0530T1G
D2 "Comment" SOD3716X135N 178.25,31.55 r180 top value=MBR0530T1G
FL1 "Comment" BLM21AG102BH1J 182.65,13.15 r180 top value=BLM21AG601SN1D
IC1 "Comment" SOTFL50P160X60-8N 177.6,25.3 r0 top value=TPS629203QDRLRQ1
IC2 "Comment" SOT95P285X140-5N 203.75,12.5 r90 top value=AP2112K-3.3TRG1
IC3 "Comment" SOT95P280X145-6N 198.15,28.75 r90 top value=USBLC6-2SC6
J1 "Comment" TMS-102-YY-XX-S 191.365,36.15 r180 top value=TMS-102-21-G-S
J2 "Comment" AMPHENOL_10155435-00011LF 205.2,20.85 r90 top value=10155435-00011LF
J3 "Comment" TMS-102-YY-XX-S 181.365,36.15 r180 top value=TMS-102-21-G-S
J4 "Comment" TMS-102-YY-XX-S 196.235,5.54 r180 top value=TMS-102-21-G-S
J5 "Comment" TMS-102-YY-XX-S 186.235,5.54 r180 top value=TMS-102-21-G-S
J6 "Comment" TMS-102-YY-XX-S 174.7,36.15 r180 top value=TMS-102-21-G-S
J7 "Comment" TMS-102-YY-XX-S 174.595,5.54 r180 top value=TMS-102-21-G-S
J8 "Comment" TMS-102-YY-XX-S 196.365,36.15 r180 top value=TMS-102-21-G-S
J9 "Comment" TMS-102-YY-XX-S 186.365,36.15 r180 top value=TMS-102-21-G-S
J10 "Comment" TMS-102-YY-XX-S 191.235,5.54 r180 top value=TMS-102-21-G-S
J11 "Comment" TMS-102-YY-XX-S 181.235,5.54 r180 top value=TMS-102-21-G-S
J12 "Comment" TMS-102-YY-XX-S 202.93,36.15 r180 top value=TMS-102-21-G-S
J13 "Comment" TMS-102-YY-XX-S 202.835,5.54 r180 top value=TMS-102-21-G-S
J14 "Comment" TMS-102-YY-XX-S 171.2,20.08 r90 top value=TMS-102-21-G-S
L1 "Comment" INDC2520X100N 174.85,27.85 r90 top value=SRP3212-2R2M
R1 "Comment" CRCW0402200KFKED 178.175,27.95 r0 top value=CRCW040227K4FKED
R2 "Comment" RESC1005X40N 182.15,29.4 r0 top value=RC0402FR-0710KL
R3 "Comment" RESC1005X40N 187.85,29.4 r0 top value=RC0402FR-0710KL
R4 "Comment" RESC0402X15N 199,19.238 r270 top value=CRCW01005K10FREL
R5 "Comment" RESC0402X15N 198.85,22.95 r90 top value=CRCW01005K10FREL
U1 "Comment" TFBGA-265_14x14mm_Layout17x17_P0.8mm 188.1,20.75 r0 top value=STM32H755XIHx
Y1 "Comment" LFXTAL085880 177.6,18.25 r270 top value=LFXTAL085880

## Footprints (in the part's own frame and the unit in brackets; to place one, negate y for a bottom-side part, rotate by r counter-clockwise, add the part's x,y. Pads: shape width x height; smd on the part's side, far side on the other; paste and mask are expansions set on the pad)
AMPHENOL_10155435-00011LF [mm]
  rect 0.6x1.15 smd paste-1.15 mask-1.15: A1_B12(-3.2,4.745) A4_B9(-2.4,4.745) B1_A12(3.2,4.745) B4_A9(2.4,4.745)
  rect 0.3x1.15 smd paste-1.15 mask-1.15: A5(-1.25,4.745) A6(-0.25,4.745) A7(0.25,4.745) A8(1.25,4.745) B5(1.75,4.745) B6(0.75,4.745) B7(-0.75,4.745) B8(-1.75,4.745)
  rrect100% 1.05x2.15 hole 1.75 slot 0.65 at 0 deg paste-2539.97 mask-2.15: SH1(-4.32,4.18) SH2(4.32,4.18)
  rrect100% 1.05x1.85 hole 1.45 slot 0.65 at 0 deg paste-2539.97 mask-1.85: SH3(-4.32,0) SH4(4.32,0)
  round 0.65 hole 0.65 paste-2539.97 mask-0.65: Un1(-2.89,3.68) Un2(2.89,3.68)
  F.SilkS lines w0.254: -4.47,2.785 -4.47,1.245 ; 4.47,2.785 4.47,1.245 ; -4.47,-1.245 -4.47,-2.6 4.47,-2.6 4.47,-1.245
  F.CrtYd lines w0.254: -5.095,5.57 -5.095,-2.85 5.095,-2.85 5.095,5.57 -5.095,5.57
BLM21AG102BH1J [mm]
  rect 0.6x1.25 on Mid2 paste-1.25 mask-1.25: 1(-0.9,0) 2(0.9,0)
  B.SilkS lines w0.254: 0,0.525 0,-0.525
  B.CrtYd lines w0.254: 2.2,1.625 -2.2,1.625 -2.2,-1.625 2.2,-1.625 2.2,1.625
CAPC1608X90N#1 [mm]
  rect 0.78x0.99 on Mid2 paste-0.99 mask-0.99: 1(-0.7,0) 2(0.7,0)
  B.CrtYd lines w0.254: 1.24,0.65 -1.24,0.65 -1.24,-0.65 1.24,-0.65 1.24,0.65
CAPC1608X90N#2 [mm]
  rect 0.78x0.99 smd paste-0.99 mask-0.99: 1(-0.7,0) 2(0.7,0)
  F.CrtYd lines w0.254: 1.24,0.65 -1.24,0.65 -1.24,-0.65 1.24,-0.65 1.24,0.65
CAPC1709X100N [mm]
  rect 0.81x1.04 smd paste-1.04 mask-1.04: 1(-0.72,0) 2(0.72,0)
  F.CrtYd lines w0.254: -1.275,-0.67 1.275,-0.67 1.275,0.67 -1.275,0.67 -1.275,-0.67
CAPC3216X95N [mm]
  rect 1.05x1.82 smd paste-1.82 mask-1.82: 1(-1.39,0) 2(1.39,0)
  F.SilkS lines w0.254: 0,-0.7 0,0.7
  F.CrtYd lines w0.254: 2.065,-1.06 2.065,1.06 -2.065,1.06 -2.065,-1.06 2.065,-1.06
CAPC3216X190N#1 [mm]
  rect 1.02x1.82 on Mid2 paste-1.82 mask-1.82: 1(-1.4,0) 2(1.4,0)
  B.SilkS lines w0.254: 0,0.7 0,-0.7
  B.CrtYd lines w0.254: 2.06,1.06 -2.06,1.06 -2.06,-1.06 2.06,-1.06 2.06,1.06
CAPC3216X190N#2 [mm]
  rect 1.02x1.82 smd paste-1.82 mask-1.82: 1(-1.4,0) 2(1.4,0)
  F.SilkS lines w0.254: 0,-0.7 0,0.7
  F.CrtYd lines w0.254: -2.06,-1.06 2.06,-1.06 2.06,1.06 -2.06,1.06 -2.06,-1.06
CAPC3216X229N [mm]
  rect 1.1x1.92 on Mid2 paste-1.92 mask-1.92: 1(-1.41,0) 2(1.41,0)
  B.SilkS lines w0.254: 0,0.7 0,-0.7
  B.CrtYd lines w0.254: 2.11,1.11 -2.11,1.11 -2.11,-1.11 2.11,-1.11 2.11,1.11
CRCW0402200KFKED [mm]
  rect 0.6x0.6 smd paste-0.6 mask-0.6: 1(-0.525,0) 2(0.525,0)
  F.SilkS lines w0.254: -1.3,-0.1 ccw(c-1.3,0) -1.3,0.1 ccw(c-1.3,0) -1.3,-0.1
  F.CrtYd lines w0.254: -1.825,-1.3 1.825,-1.3 1.825,1.3 -1.825,1.3 -1.825,-1.3
INDC2520X100N [mm]
  rect 1.2x2.2 smd paste-2.2 mask-2.2: 1(-1.1,0) 2(1.1,0)
  F.SilkS lines w0.254: 0,0.9 0,-0.9
  F.CrtYd lines w0.254: -1.95,1.35 -1.95,-1.35 1.95,-1.35 1.95,1.35 -1.95,1.35
LFXTAL085880 [mm]
  rect 1.4x1.2 smd paste-1.4 mask-1.4: 1(-1.1,-0.85) 2(1.1,-0.85) 3(1.1,0.85) 4(-1.1,0.85)
  F.SilkS lines w0.254: -1.1,-2 cw(c-1.1,-1.95) -1.1,-1.9 cw(c-1.1,-1.95) -1.1,-2
  F.CrtYd lines w0.254: 2.8,-2.45 2.8,2.45 -2.8,2.45 -2.8,-2.45 2.8,-2.45
RESC0402X15N [mm]
  rect 0.525x0.35 smd paste-0.525 mask-0.525: 1(-0.362,0) 2(0.362,0)
  F.CrtYd lines w0.254: 0.875,-0.45 0.875,0.45 -0.875,0.45 -0.875,-0.45 0.875,-0.45
RESC1005X40N [mm]
  rect 0.75x0.6 smd paste-0.75 mask-0.75: 1(-0.55,0) 2(0.55,0)
  F.CrtYd lines w0.254: -1.175,-0.55 1.175,-0.55 1.175,0.55 -1.175,0.55 -1.175,-0.55
SOD3716X135N [mm]
  rect 1.15x0.8 smd paste-1.15 mask-1.15: 1(-1.75,0) 2(1.75,0)
  F.SilkS lines w0.254: -2.325,0.8 1.345,0.8 ; -1.345,-0.8 1.345,-0.8
  F.CrtYd lines w0.254: -2.575,-1.67 2.575,-1.67 2.575,1.67 -2.575,1.67 -2.575,-1.67
SOT95P280X145-6N [mm]
  rect 1.2x0.6 smd paste-1.2 mask-1.2: 1(-1.25,0.95) 2(-1.25,0) 3(-1.25,-0.95) 4(1.25,-0.95) 5(1.25,0) 6(1.25,0.95)
  F.SilkS lines w0.254: -1.85,1.6 -0.65,1.6 ; -0.3,1.462 -0.3,-1.462 0.3,-1.462 0.3,1.462 -0.3,1.462
  F.CrtYd lines w0.254: -2.1,1.775 -2.1,-1.775 2.1,-1.775 2.1,1.775 -2.1,1.775
SOT95P285X140-5N [mm]
  rect 1.15x0.6 smd paste-1.15 mask-1.15: 1(-1.3,0.95) 2(-1.3,0) 3(-1.3,-0.95) 4(1.3,-0.95) 5(1.3,0.95)
  F.SilkS lines w0.254: -1.875,1.5 -0.725,1.5 ; -0.375,1.5 -0.375,-1.5 0.375,-1.5 0.375,1.5 -0.375,1.5
  F.CrtYd lines w0.254: -2.125,1.8 -2.125,-1.8 2.125,-1.8 2.125,1.8 -2.125,1.8
SOTFL50P160X60-8N [mm]
  rect 0.475x0.3 smd paste-0.475 mask-0.475: 1(-0.838,0.75) 2(-0.838,0.25) 3(-0.838,-0.25) 4(-0.838,-0.75) 5(0.838,-0.75) 6(0.838,-0.25) 7(0.838,0.25) 8(0.838,0.75)
  F.SilkS lines w0.254: -1.075,1.15 -0.6,1.15 ; -0.25,-1.05 0.25,-1.05 0.25,1.05 -0.25,1.05 -0.25,-1.05
  F.CrtYd lines w0.254: -1.225,-1.25 1.225,-1.25 1.225,1.25 -1.225,1.25 -1.225,-1.25
TFBGA-265_14x14mm_Layout17x17_P0.8mm [mm]
  round 0.325 smd paste-0.325 mask-0.325: A1(-6.4,6.4) A2(-5.6,6.4) A3(-4.8,6.4) A4(-4,6.4) A5(-3.2,6.4) A6(-2.4,6.4) A7(-1.6,6.4) A8(-0.8,6.4) A9(0,6.4) A10(0.8,6.4) A11(1.6,6.4) A12(2.4,6.4) A13(3.2,6.4) A14(4,6.4) A15(4.8,6.4) A16(5.6,6.4) A17(6.4,6.4) B1(-6.4,5.6) B2(-5.6,5.6) B3(-4.8,5.6) B4(-4,5.6) B5(-3.2,5.6) B6(-2.4,5.6) B7(-1.6,5.6) B8(-0.8,5.6) B9(0,5.6) B10(0.8,5.6) B11(1.6,5.6) B12(2.4,5.6) B13(3.2,5.6) B14(4,5.6) B15(4.8,5.6) B16(5.6,5.6) B17(6.4,5.6) C1(-6.4,4.8) C2(-5.6,4.8) C3(-4.8,4.8) C4(-4,4.8) C5(-3.2,4.8) C6(-2.4,4.8) C7(-1.6,4.8) C8(-0.8,4.8) C9(0,4.8) C10(0.8,4.8) C11(1.6,4.8) C12(2.4,4.8) C13(3.2,4.8) C14(4,4.8) C15(4.8,4.8) C16(5.6,4.8) C17(6.4,4.8) D1(-6.4,4) D2(-5.6,4) D3(-4.8,4) D4(-4,4) D5(-3.2,4) D6(-2.4,4) D7(-1.6,4) D8(-0.8,4) D9(0,4) D10(0.8,4) D11(1.6,4) D12(2.4,4) D13(3.2,4) D14(4,4) D15(4.8,4) D16(5.6,4) D17(6.4,4) E1(-6.4,3.2) E2(-5.6,3.2) E3(-4.8,3.2) E4(-4,3.2) E5(-3.2,3.2) E6(-2.4,3.2) E7(-1.6,3.2) E8(-0.8,3.2) E9(0,3.2) E10(0.8,3.2) E11(1.6,3.2) E12(2.4,3.2) E13(3.2,3.2) E14(4,3.2) E15(4.8,3.2) E16(5.6,3.2) E17(6.4,3.2) F1(-6.4,2.4) F2(-5.6,2.4) F3(-4.8,2.4) F4(-4,2.4) F5(-3.2,2.4) F13(3.2,2.4) F14(4,2.4) F15(4.8,2.4) F16(5.6,2.4) F17(6.4,2.4) G1(-6.4,1.6) G2(-5.6,1.6) G3(-4.8,1.6) G4(-4,1.6) G5(-3.2,1.6) G7(-1.6,1.6) G8(-0.8,1.6) G9(0,1.6) G10(0.8,1.6) G11(1.6,1.6) G13(3.2,1.6) G14(4,1.6) G15(4.8,1.6) G16(5.6,1.6) G17(6.4,1.6) H1(-6.4,0.8) H2(-5.6,0.8) H3(-4.8,0.8) H4(-4,0.8) H5(-3.2,0.8) H7(-1.6,0.8) H8(-0.8,0.8) H9(0,0.8) H10(0.8,0.8) H11(1.6,0.8) H13(3.2,0.8) H14(4,0.8) H15(4.8,0.8) H16(5.6,0.8) H17(6.4,0.8) J1(-6.4,0) J2(-5.6,0) J3(-4.8,0) J4(-4,0) J5(-3.2,0) J7(-1.6,0) J8(-0.8,0) J9(0,0) J10(0.8,0) J11(1.6,0) J13(3.2,0) J14(4,0) J15(4.8,0) J16(5.6,0) J17(6.4,0) K1(-6.4,-0.8) K2(-5.6,-0.8) K3(-4.8,-0.8) K4(-4,-0.8) K5(-3.2,-0.8) K7(-1.6,-0.8) K8(-0.8,-0.8) K9(0,-0.8) K10(0.8,-0.8) K11(1.6,-0.8) K13(3.2,-0.8) K14(4,-0.8) K15(4.8,-0.8) K16(5.6,-0.8) K17(6.4,-0.8) L1(-6.4,-1.6) L2(-5.6,-1.6) L3(-4.8,-1.6) L4(-4,-1.6) L5(-3.2,-1.6) L7(-1.6,-1.6) L8(-0.8,-1.6) L9(0,-1.6) L10(0.8,-1.6) L11(1.6,-1.6) L13(3.2,-1.6) L14(4,-1.6) L15(4.8,-1.6) L16(5.6,-1.6) L17(6.4,-1.6) M1(-6.4,-2.4) M2(-5.6,-2.4) M3(-4.8,-2.4) M4(-4,-2.4) M5(-3.2,-2.4) M13(3.2,-2.4) M14(4,-2.4) M15(4.8,-2.4) M16(5.6,-2.4) M17(6.4,-2.4) N1(-6.4,-3.2) N2(-5.6,-3.2) N3(-4.8,-3.2) N4(-4,-3.2) N5(-3.2,-3.2) N6(-2.4,-3.2) N7(-1.6,-3.2) N8(-0.8,-3.2) N9(0,-3.2) N10(0.8,-3.2) N11(1.6,-3.2) N12(2.4,-3.2) N13(3.2,-3.2) N14(4,-3.2) N15(4.8,-3.2) N16(5.6,-3.2) N17(6.4,-3.2) P1(-6.4,-4) P2(-5.6,-4) P3(-4.8,-4) P4(-4,-4) P5(-3.2,-4) P6(-2.4,-4) P7(-1.6,-4) P8(-0.8,-4) P9(0,-4) P10(0.8,-4) P11(1.6,-4) P12(2.4,-4) P13(3.2,-4) P14(4,-4) P15(4.8,-4) P16(5.6,-4) P17(6.4,-4) R1(-6.4,-4.8) R2(-5.6,-4.8) R3(-4.8,-4.8) R4(-4,-4.8) R5(-3.2,-4.8) R6(-2.4,-4.8) R7(-1.6,-4.8) R8(-0.8,-4.8) R9(0,-4.8) R10(0.8,-4.8) R11(1.6,-4.8) R12(2.4,-4.8) R13(3.2,-4.8) R14(4,-4.8) R15(4.8,-4.8) R16(5.6,-4.8) R17(6.4,-4.8) T1(-6.4,-5.6) T2(-5.6,-5.6) T3(-4.8,-5.6) T4(-4,-5.6) T5(-3.2,-5.6) T6(-2.4,-5.6) T7(-1.6,-5.6) T8(-0.8,-5.6) T9(0,-5.6) T10(0.8,-5.6) T11(1.6,-5.6) T12(2.4,-5.6) T13(3.2,-5.6) T14(4,-5.6) T15(4.8,-5.6) T16(5.6,-5.6) T17(6.4,-5.6) U1(-6.4,-6.4) U2(-5.6,-6.4) U3(-4.8,-6.4) U4(-4,-6.4) U5(-3.2,-6.4) U6(-2.4,-6.4) U7(-1.6,-6.4) U8(-0.8,-6.4) U9(0,-6.4) U10(0.8,-6.4) U11(1.6,-6.4) U12(2.4,-6.4) U13(3.2,-6.4) U14(4,-6.4) U15(4.8,-6.4) U16(5.6,-6.4) U17(6.4,-6.4)
  F.SilkS region: -7.11,7.11 -7.61,7.11 -7.11,7.61
  F.SilkS lines w0.254: -7.11,6.11 -7.11,-7.11 7.11,-7.11 7.11,7.11 -6.11,7.11
  F.CrtYd lines w0.254: -8,-8 8,-8 8,8 -8,8 -8,-8
TMS-102-YY-XX-S [mm]
  round 1.1 hole 0.66 paste-2539.97 mask-1.1: 1(0,0) 2(1.27,0)
  F.SilkS circle w0.254: c-0.05,1.5 r0.05
  F.SilkS lines w0.254: 1.905,1.219 -0.635,1.219 ; 1.905,-1.219 -0.635,-1.219
  F.CrtYd lines w0.254: 3.105,2.6 -1.835,2.6 -1.835,-2.419 3.105,-2.419 3.105,2.6

## Part data
C1 C2 C3 C4 C5 C6 C7 C8 C9 C10 C11 C12 C13 C14 C15 C16 C17 C18 C19 C20 C21 C25 C28 C37 C38 C39 C40 C41: library part CAPC1608X90N, "0603-1", Mouser Part Number=603-CC603JRX7R9BB104, Manufacturer_Name=YAGEO, Manufacturer_Part_Number=CC0603JRX7R9BB104, Datasheet=https://www.yageo.com/upload/media/product/productsearch/datasheet/mlcc/UPY-GPHC_X7R_6.3V-to-250V_22.pdf, Description="Multilayer Ceramic Capacitors MLCC - SMD/SMT 50 V 0.1uF X7R 0603 5%", Height=0.9, Mouser Price/Stock=https://www.mouser.co.uk/ProductDetail/YAGEO/CC0603JRX7R9BB104?qs=57cj7OiSijmjSM%252BQadQODQ%3D%3D
C22 C23 C33: library part CAPC1709X100N, "0603 (1608 Metric)_2024", Mouser Part Number=963-MLASG168BB5475KT, Manufacturer_Name="TAIYO YUDEN", Manufacturer_Part_Number=MLASG168BB5475KTNA01, Datasheet=https://ds.yuden.co.jp/TYCOMPAS/ap/specSheet?pn=MLASG168BB5475KTNA01, Description="4.7 F +/-10% 35V Ceramic Capacitor X5R 0603 (1608 Metric)", Height=1, Mouser Price/Stock=https://www.mouser.co.uk/ProductDetail/TAIYO-YUDEN/MLASG168BB5475KTNA01?qs=tlsG%2FOw5FFhCGJXg7RRAyQ%3D%3D
C24: library part CAPC3216X95N, "CL31A226KOCLNNC", Mouser Part Number=187-CL31A226KOCLNNC, Manufacturer_Name=SAMSUNG, Datasheet=https://datasheet.datasheetarchive.com/originals/distributors/Datasheets_SAMA/af94cf50e6d9d8f15c5fd4c15db6c964.pdf, Description="Samsung Electro-Mechanics 1206 CL 22uF Ceramic Multilayer Capacitor, 16 V, +85C, X5R Dielectric, +/-10% SMD", Height=0.95, Mouser Price/Stock=https://www.mouser.co.uk/ProductDetail/Samsung-Electro-Mechanics/CL31A226KOCLNNC?qs=X6jEic%2FHinC3Oh0BQrI53w%3D%3D, Manufacturer_Part_Number=CL31A226KOCLNNC
C26 C27 C32 C34 C35: library part CAPC3216X190N, "1206 (3216 Metric)-ren5", Mouser Part Number=581-KGM31HR71C105JU, Manufacturer_Name="Kyocera AVX", Manufacturer_Part_Number=KGM31HR71C105JU, Datasheet=https://spicat.kyocera-avx.com/product/mlcc/chartview/KGM31HR71C105JU/DataSheet/X7R, Description="Multilayer Ceramic Capacitors MLCC - SMD/SMT 16V 1uF X7R 1206 5%", Height=1.9, Mouser Price/Stock=https://www.mouser.co.uk/ProductDetail/KYOCERA-AVX/KGM31HR71C105JU?qs=Jm2GQyTW%2FbiIcGE031ASbA%3D%3D
C29 C30: library part CAPC3216X229N, "1206 ..", Mouser Part Number=581-12065C225JAT2A, Manufacturer_Name="Kyocera AVX", Manufacturer_Part_Number=12065C225JAT2A, Description="Multilayer Ceramic Capacitors MLCC - SMD/SMT 2.2UF 50V 5% 1206", Height=2.29, Mouser Price/Stock=https://www.mouser.co.uk/ProductDetail/KYOCERA-AVX/12065C225JAT2A?qs=T3oQrply3y8mt4oSQI9cEw%3D%3D
C31 C36: library part CAPC1608X90N, "0603-1", Mouser Part Number=581-06035C3R9CAT2A, Manufacturer_Name="Kyocera AVX", Manufacturer_Part_Number=06035C3R9CAT2A, Datasheet=https://componentsearchengine.com/Datasheets/1/06031A100FAT2A.pdf, Description="Multilayer Ceramic Capacitors MLCC - SMD/SMT T101 COMMERCIAL", Height=0.9, Mouser Price/Stock=https://www.mouser.co.uk/ProductDetail/AVX/06035C3R9CAT2A?qs=k4kUdCzLgS4to0WEc2epxQ%3D%3D
D1 D2: library part SOD3716X135N, "SOD-123", Mouser Part Number=863-MBR0530T1G, Manufacturer_Name=onsemi, Manufacturer_Part_Number=MBR0530T1G, Datasheet=https://www.onsemi.com/pub/Collateral/MBR0530T1-D.PDF, Description="Guardring for Stress Protection; Low Forward Voltage; 125 C Operating Junction Temperature; Epoxy Meets UL94, VO at 1/8\"; Package Designed for Optimal Automated Board Assembly Mechanical Characteristics:; Reel Options: MBR0530T1 = 3,000 per 7\" reel/8 mm tape MBR0530T3 = 10,000 per 13\" reel/8 mm tape; Device Marking: B3; Polarity Designator: Cathode Band; Weight: 11.7 mg (approximately); Case: Epoxy, Molded; Finish: All External Surfaces Corrosion Resistant and Terminal Leads are Readily Solderable; Lead and", Height=1.35, Mouser Price/Stock=https://www.mouser.co.uk/ProductDetail/onsemi/MBR0530T1G?qs=3JMERSakeboS%2FFOxJUMWeg%3D%3D
FL1: library part BLM21AG102BH1J, "BLM21_3 L=2.0 W=1.25 T=0.85", Mouser Part Number=81-BLM21A601F, Manufacturer_Name="Murata Electronics", Manufacturer_Part_Number=BLM21AG601SN1D, Datasheet=https://www.murata.com/en-us/products/productdetail?partno=BLM21AG601SN1%23, Description="BLM21_N1D Series EMI Suppression Filter 600+/-25% at 100MHz 700mA @85", Height=1.05, Mouser Price/Stock=https://www.mouser.co.uk/ProductDetail/Murata-Electronics/BLM21AG601SN1D?qs=eh6oC%2F9l24pbrhIl76%2FqAA%3D%3D
IC1: library part SOTFL50P160X60-8N, "DRL0008A", Mouser Part Number=595-TPS629203QDRLRQ1, Manufacturer_Name="Texas Instruments", Manufacturer_Part_Number=TPS629203QDRLRQ1, Datasheet=https://www.ti.com/lit/ds/symlink/tps629203-q1.pdf?ts=1688028117447&ref_url=https%253A%252F%252Fwww.ti.com%252Fproduct%252FTPS629203-Q1%252Fpart-details%252FTPS629203QDRLRQ1, Description="Switching Voltage Regulators Automotive 3-V to 17-V, 0.3-A, low-IQ, synchronous buck converter in SOT-583 package", Height=0.6, Mouser Price/Stock=https://www.mouser.co.uk/ProductDetail/Texas-Instruments/TPS629203QDRLRQ1?qs=t7xnP681wgXRtyDG5rrDnQ%3D%3D
IC2: library part SOT95P285X140-5N, "SOT25_2024-1", Mouser Part Number=621-AP2112K-3.3TRG1, Manufacturer_Name="Diodes Incorporated", Manufacturer_Part_Number=AP2112K-3.3TRG1, Datasheet=https://www.diodes.com//assets/Datasheets/AP2112.pdf, Description="600mA 3.3V LDO Regulator Enable SOT23-5 DiodesZetex AP2112K-3.3TRG1, LDO Voltage Regulator, 3.3 V +/-1.5%, 2.5  6 Vin, 5-Pin SOT-23", Height=1.4, Mouser Price/Stock=https://www.mouser.co.uk/ProductDetail/Diodes-Incorporated/AP2112K-3.3TRG1?qs=x6A8l6qLYDDPYHosCdzh%2FA%3D%3D
IC3: library part SOT95P280X145-6N, "SOT23-6L_1", Mouser Part Number=511-USBLC6-2SC6, Manufacturer_Name=STMicroelectronics, Manufacturer_Part_Number=USBLC6-2SC6, Datasheet=https://www.st.com/resource/en/datasheet/usblc6-2.pdf, Description="TVS Diode Array Uni-Directional USBLC6-2SC6 17V, SOT-23 6-Pin", Height=1.45, Mouser Price/Stock=https://www.mouser.co.uk/ProductDetail/STMicroelectronics/USBLC6-2SC6?qs=po45yt2pPpu%2FhNIlwQdTlg%3D%3D
J1 J3 J4 J5 J6 J7 J8 J9 J10 J11 J12 J13 J14: library part TMS-102-YY-XX-S, "TMS-102-YY-XX-S", Mouser Part Number=200-TMS10221GS, Manufacturer_Name=SAMTEC, Manufacturer_Part_Number=TMS-102-21-G-S, Datasheet=http://suddendocs.samtec.com/prints/tms-1xx-xx-xx-x-xx-xxx-mkt.pdf, Description="2 Position, Single-Row .050&quot; x .100&quot; Micro Terminal Strip", Mouser Price/Stock=https://www.mouser.co.uk/ProductDetail/Samtec/TMS-102-21-G-S?qs=0lQeLiL1qya3I3g9lQbxtA%3D%3D
J2: library part AMPHENOL_10155435-00011LF, MAXIMUM_PACKAGE_HEIGHT="3.37 mm", Package=None, MANUFACTURER=Amphenol, DigiKey_Part_Number=609-10155435-00011LFCT-ND, SnapEDA_Link=https://www.snapeda.com/parts/10155435-00011LF/Amphenol/view-part/?ref=snap, Check_prices=https://www.snapeda.com/parts/10155435-00011LF/Amphenol/view-part/?ref=eda, STANDARD="Manufacturer Recommendations", PARTREV=C, MF="Amphenol FCI", MP=10155435-00011LF, Description_1="USB Type C Receptacle SMT Single Row 16Pin"
L1: library part INDC2520X100N, "SRP3212", Mouser Part Number=652-SRP3212-2R2M, Manufacturer_Name=Bourns, Manufacturer_Part_Number=SRP3212-2R2M, Datasheet=https://www.bourns.com/pdfs/CVH.pdf, Description=Ind,3.2x2.5x1mm,2.2uH?20%,4A,shd, Height=1, Mouser Price/Stock=https://www.mouser.co.uk/ProductDetail/Bourns/SRP3212-2R2M?qs=t7xnP681wgW9NT%2FfJNx1CA%3D%3D
R1: library part CRCW0402200KFKED, "CRCW0402", Mouser Part Number=71-CRCW0402-27.4K-E3, Manufacturer_Name=Vishay, Manufacturer_Part_Number=CRCW040227K4FKED, Datasheet=http://www.vishay.com/docs/20035/dcrcwe3.pdf, Description="Vishay CRCW Series Thick Film Surface Mount Resistor 0402 Case 27.4k +/-1% 0.063W +/-100ppm/C", Height=0.4, Mouser Price/Stock=https://www.mouser.co.uk/ProductDetail/Vishay-Dale/CRCW040227K4FKED?qs=hD42E%2F8yzjo1p2852u38Sw%3D%3D
R2 R3: library part RESC1005X40N, "RC0402", Mouser Part Number=603-RC0402FR-0710KL, Manufacturer_Name=YAGEO, Manufacturer_Part_Number=RC0402FR-0710KL, Datasheet=http://www.yageo.com/documents/recent/PYu-RC0402_51_RoHS_L_6_r.pdf, Description="YAGEO (PHYCOMP) - RC0402FR-0710KL. - RES, THICK FILM, 10K, 1%, 0.0625W, 0402", Height=0.4, Mouser Price/Stock=https://www.mouser.co.uk/ProductDetail/YAGEO/RC0402FR-0710KL?qs=I1mnnYJTTsxUoNwrUsQExA%3D%3D
R4 R5: library part RESC0402X15N, "CRCW0100+", Mouser Part Number=71-CRCW01005K10FREL, Manufacturer_Name=Vishay, Manufacturer_Part_Number=CRCW01005K10FREL, Datasheet=http://www.vishay.com/docs/20056/crcw01005e3.pdf, Description="Thick Film Resistors - SMD 01005 5.1Kohm 1% 250ppm 0.031watts", Height=0.15, Mouser Price/Stock=https://www.mouser.co.uk/ProductDetail/Vishay-Dale/CRCW01005K10FREL?qs=1mbolxNpo8dej5SLtoRDjQ%3D%3D
U1: library part TFBGA-265_14x14mm_Layout17x17_P0.8mm, "TFBGA-265, 14.0x14.0mm, 265 Ball, 17x17 Layout, 0.8mm Pitch, generated with kicad-footprint-generator ipc_bga_generator.py, http://www.st.com/resource/en/datasheet/DM00387108.pdf#page=223", Datasheet=https://www.st.com/resource/en/datasheet/stm32h755xi.pdf, Description="STMicroelectronics Arm Cortex-M7 MCU, 2048KB flash, 1024KB RAM, 480 MHz, 1.62-3.6V, 172 GPIO, TFBGA240", ki_fp_filters=TFBGA*14x14mm*Layout17x17*P0.8mm*
Y1: library part LFXTAL085880, "LFXTAL085880-3", Manufacturer_Name=IQD, Datasheet=https://portal.iqdfrequencyproducts.com/products/details/cfpx-180.pdf, Description="25 MHz +/-20ppm Crystal 8pF 50 Ohms 4-SMD, No Lead", Height=0.8, Manufacturer_Part_Number=LFXTAL085880

## Via types
v1: diameter 0.35, hole 0.2, F.Cu to B.Cu, tented both sides, 46 vias
v2: diameter 0.35, hole 0.2, F.Cu to In2.Cu, tented both sides, 10 vias
v3: diameter 0.6, hole 0.3, F.Cu to In1.Cu, tented both sides, 8 vias
v4: diameter 0.35, hole 0.2, F.Cu to In1.Cu, tented both sides, 4 vias
v5: diameter 0.35, hole 0.2, In1.Cu to In2.Cu, tented both sides, 2 vias
v6: diameter 0.6, hole 0.3, In1.Cu to In2.Cu, tented both sides, 2 vias
v7: diameter 0.35, hole 0.2, B.Cu to In2.Cu, tented both sides, 1 vias
v8: diameter 0.6, hole 0.3, F.Cu to B.Cu, tented both sides, 1 vias

## Nets (pads, with @x,y where several pads share a name; then routed paths per layer and width w, separated by ;. In a path a pad name is that pad's centre, name@x,y a point inside that pad or via, vN(x,y) a via of type N, cw(c..) or ccw(c..) an arc to the next point about the centre after c; other vN are vias at no path point)
3V3: C1.1 C2.1 C3.1 C4.1 C5.1 C6.1 C7.1 C8.1 C9.1 C10.1 C11.1 C12.1 C13.1 C14.1 C15.1 C16.1 C17.1 C18.1 C19.1 C20.1 C21.1 C23.1 C32.1 C37.1 C38.1 C39.1 C40.1 C41.1 D1.1 D2.1 FL1.1 U1.A6 U1.B1 U1.C17 U1.E6 U1.E7 U1.E9 U1.E11 U1.F1 U1.F5 U1.F17 U1.G5 U1.G13 U1.H5 U1.H13 U1.J13 U1.K5 U1.K13 U1.L5 U1.L13 U1.M5 U1.M13 U1.N7 U1.N8 U1.N10 U1.N11 U1.N12 U1.P17 U1.U12 | length 38.5
  F.Cu w0.2: D2.1 191.78,31.55 C23.1 v8(190.25,32.05)
  B.Cu w0.2: C4.1 184.45,23.15 v1(184.9,23.15) ; C14.1@184.9,18.25 v1(184.9,18.35) ; v1(184.9,19.95) 184.9,20.4 185.05,20.55 C10.1 ; v1(184.9,22.35) 185.1,22.15 C11.1 ; v1(186.5,23.95) 186.75,24.2 v7(186.75,25.5) ; C19.1 189.35,18.9 189.7,18.55 v1(189.7,17.55) ; C5.1 v1(191.3,19.95) ; v1(191.3,18.35) 191.8,17.85 C15.1 ; v1(191.3,19.15) 192.7,19.15 C13.1 ; v1(191.3,20.75) 192.45,20.75 C9.1 ; v1(191.3,22.35) C6.1@191.35,22.35 ; v1(194.5,23.15) C32.1@194.55,23.15 ; v1(184.9,18.35) 184.6,18.35 184.5,18.25 184.5,17.311 184.55,17.261 185.239,17.261 185.25,17.25 185.25,18.35 v1(184.9,18.35)
  In2.Cu w0.2: v7(186.75,25.5) 190.25,29 v8(190.25,32.05)
  other v1: 190.5,14.35 194.5,16.75 186.5,17.55 187.3,17.55 188.9,17.55 190.5,17.55 184.9,19.15 189.7,19.15 188.1,19.95 188.9,19.95 189.7,19.95 184.9,21.55 181.7,23.15 185.7,23.95 188.1,23.95 189.7,23.95 194.5,25.55 181.7,26.35 185.7,27.15
3V3A: C25.1 C26.1 C27.1 C28.1 FL1.2 U1.L1 U1.M1
  other v1: 181.7,18.35 181.7,19.15
5VUSB: C33.1 C34.1 IC2.1 IC2.3 IC3.5 J2.A4_B9 J2.B4_A9 U1.G17 | length 43.9
  F.Cu w0.2: U1.G17 198.537,18.313 J2.A4_B9@200.916,18.313 ; IC3.5 198.15,30.552 198.499,30.901 202.549,30.901 202.88,30.57 C33.1 202.3,28.92 C34.1 202.396,27.604 202.396,23.66 ; J2.B4_A9 200.641,23.064 201.8,23.064 202.396,23.66 ; IC2.1 202.8,10 202.9,9.9 204.6,9.9 204.7,10 IC2.3 204.7,11.727 203.974,12.453 203.974,16.462 201.8,18.636 200.641,18.636 J2.A4_B9 201,18.45 202.396,19.846 202.396,23.66
APU1A: J8.1 U1.P9 | length 22.8
  In1.Cu w0.2: v6(190.25,22.15) 190.25,30.035 J8.1
  In2.Cu w0.2: v2(188.1,16.75) 188.1,20 v6(190.25,22.15)
APU1B: J1.1 U1.A14 | length 9.3
  In2.Cu w0.2: J1.1 191.365,27.885 v2(192.1,27.15)
APU1C: J9.1 U1.B7 | length 10.2
  In2.Cu w0.2: J9.1 186.9,35.615 186.9,26.75 v2(186.5,26.35)
APU1D: J3.1 U1.R16 | length 27.6
  In1.Cu w0.2: v5(184.4,29.9) 184.4,21.377 189.827,15.95 v2(193.7,15.95)
  In2.Cu w0.2: J3.1 181.365,32.935 v5(184.4,29.9)
APU2A: J4.1 U1.N5 | length 17.2
  In1.Cu w0.2: v5(185.1,16.65) 193.9,7.85 v6(194.75,7.85)
  In2.Cu w0.2: v2(184.9,17.55) 185.1,17.35 v5@185.1,16.7 ; v6(194.75,7.85) 196.235,6.365 J4.1
APU2B: J10.1 U1.F14 | length 19.8
  In2.Cu w0.2: J10.1 194.303,8.608 194.303,16.274 192.1,18.477 v2(192.1,23.15)
APU2C: J5.1 U1.U15 | length 11.6
  In2.Cu w0.2: J5.1 192.9,12.206 v2(192.9,14.35)
APU2D: J11.1 U1.D1 | length 20.4
  F.Cu w0.2: v3(180.6,9.75) 181.235,9.115 J11.1
  In1.Cu w0.2: v3(180.6,9.75) 180.6,24.45 180.9,24.75 v4(181.7,24.75)
D+: IC3.4 U1.E17 | length 9.5
  In1.Cu w0.2: 193.686,25.35 193.686,25.221 ; v4(194.5,23.95) 194.152,24.298 194.152,24.301 193.828,24.625 193.828,25.079 193.686,25.221 ; v3(199.1,30) 198.336,30 194.361,26.025 193.908,26.025 193.686,25.803 193.686,25.221
D-: IC3.6 U1.E16 | length 8.1
  In1.Cu w0.2: v4(193.7,23.95) 193.7,24.114 193.376,24.438 193.376,24.947 193.236,25.087 193.236,25.989 193.722,26.475 194.175,26.475 197.2,29.5 v3(197.2,30)
GND: C1.2 C2.2 C3.2 C4.2 C5.2 C6.2 C7.2 C8.2 C9.2 C10.2 C11.2 C12.2 C13.2 C14.2 C15.2 C16.2 C17.2 C18.2 C19.2 C20.2 C21.2 C22.2 C23.2 C24.2 C25.2 C26.2 C27.2 C28.2 C29.2 C30.2 C31.2 C32.2 C33.2 C34.2 C35.2 C36.2 C37.2 C38.2 C39.2 C40.2 C41.2 IC1.5 IC2.2 IC3.2 J1.2 J2.A1_B12 J2.B1_A12 J2.SH1 J2.SH2 J2.SH3 J2.SH4 J3.2 J4.2 J5.2 J6.2 J7.2 J8.2 J9.2 J10.2 J11.2 J12.2 J13.2 J14.1 R1.2 R2.2 R3.2 R4.2 R5.2 U1.A1 U1.A17 U1.B2 U1.B6 U1.C10 U1.C13 U1.C16 U1.F2 U1.G7 U1.G8 U1.G9 U1.G10 U1.G11 U1.G16 U1.H7 U1.H8 U1.H9 U1.H10 U1.H11 U1.J3 U1.J7 U1.J8 U1.J9 U1.J10 U1.J11 U1.J16 U1.J17 U1.K7 U1.K8 U1.K9 U1.K10 U1.K11 U1.K15 U1.L7 U1.L8 U1.L9 U1.L10 U1.L11 U1.L15 U1.M15 U1.N1 U1.N16 U1.P1 U1.R4 U1.R8 U1.T12 U1.U1 U1.U17 Y1.2 Y1.4 | length 32
  F.Cu w0.2: v1(187.3,19.15) v1(187.3,21.55) v1(187.3,22.35) ; U1.L9 v1(188.1,22.35) ; U1.L10 v1(188.9,22.35) ; v1(186.5,19.95) U1.J7 ; v1(186.5,19.95) U1.K11 ; v1(186.5,19.95) U1.L7 U1.L11 U1.K11 ; U1.J7 v1(189.7,20.75) ; U1.J7 U1.H7 ; U1.H7 U1.G7 U1.G11 U1.H11 ; U1.H7 U1.H11 ; U1.K11 v1(189.7,20.75) ; v1(189.7,20.75) U1.H11
  other v1: 187.3,20.75 188.1,21.55
Net-(C29-Pad1): C29.1 U1.U11
  other v1: 189.7,14.35
Net-(C30-Pad1): C30.1 U1.A7 U1.D17 | length 10.5
  B.Cu w0.2: v1(186.5,27.15) 189.497,27.15 191.897,24.75 v1(194.5,24.75) 194.55,24.7 C30.1
Net-(D1-A): C35.1 D1.2 IC2.5 | length 5.3
  F.Cu w0.2: C35.1 D1.2 IC2.5
Net-(D2-A): C24.1 D2.2 IC1.3 L1.2 | length 8.9
  F.Cu w0.2: C24.1 174.258,25.04 173.449,25.849 173.449,27.549 L1.2 174.85,29.9 D2.2
Net-(IC1-EN): C22.1 IC1.6 IC1.7 J14.2 | length 9.7
  F.Cu w0.2: J14.2 173.1,23.25 C22.1 177.485,23.855 177.485,24.586 177.949,25.05 IC1.6 IC1.7
Net-(IC1-MODE{slash}S-CONF): IC1.8 R1.1 | length 2.2
  F.Cu w0.2: R1.1 177.65,26.838 IC1.8
Net-(IC1-SW): IC1.4 L1.1 | length 3.6
  F.Cu w0.2: L1.1 175.35,26.75 176.224,25.876 176.224,24.599 176.272,24.55 IC1.4
Net-(J2-CC1): J2.A5 R4.1 | length 1.5
  F.Cu w0.2: R4.1 J2.A5
Net-(J2-CC2): J2.B5 R5.1 | length 1.6
  F.Cu w0.2: R5.1 198.862,22.6 J2.B5
Net-(U1-BOOT0): R3.1 U1.E8 | length 5.4
  F.Cu w0.2: v3(187.3,28.35) R3.1
  In1.Cu w0.2: v1(187.3,23.95) v3(187.3,28.35)
Net-(U1-NRST): R2.1 U1.K1 | length 9.8
  F.Cu w0.2: R2.1 181.237,29.037 181.237,20.413 U1.K1
Net-(U1-PH0): C36.1 U1.J2 Y1.1 | length 2.5
  F.Cu w0.2: Y1.1 176.75,21.6 C36.1
Net-(U1-PH1): C31.1 U1.J1 Y1.3 | length 2.4
  F.Cu w0.2: C31.1 178.45,14.8 Y1.3
STM32A: J12.1 U1.F13 | length 18.3
  In1.Cu w0.2: v4(191.3,23.15) 191.3,25.291 201.308,35.299 202.079,35.299 J12.1
STM32B: J6.1 U1.D15 | length 23.5
  In2.Cu w0.2: J6.1 174.7,35.15 185.1,24.75 v2(192.9,24.75)
STM32C: J13.1 U1.G15 | length 20.9
  In2.Cu w0.2: v2(192.9,22.35) 202.835,12.415 J13.1
STM32D: J7.1 U1.F16 | length 27.7
  In2.Cu w0.2: J7.1 185.974,16.919 185.974,18.497 191.103,23.626 193.224,23.626 v2(193.7,23.15)
unconnected-(IC1-FB{slash}VSET-Pad1): IC1.1
unconnected-(IC1-PG-Pad2): IC1.2
unconnected-(IC2-NC-Pad4): IC2.4
unconnected-(J2-SBU1-PadA8): J2.A8
unconnected-(J2-SBU2-PadB8): J2.B8
unconnected-(U1-NC-PadK16): U1.K16
unconnected-(U1-NC-PadK17): U1.K17
unconnected-(U1-NC-PadL16): U1.L16
unconnected-(U1-NC-PadL17): U1.L17
unconnected-(U1-NC-PadM16): U1.M16
unconnected-(U1-NC-PadM17): U1.M17
unconnected-(U1-NC-PadN17): U1.N17
unconnected-(U1-PA0_C-PadT1): U1.T1
unconnected-(U1-PA1-PadN4): U1.N4
unconnected-(U1-PA1_C-PadT2): U1.T2
unconnected-(U1-PA2-PadN3): U1.N3
unconnected-(U1-PA3-PadU2): U1.U2
unconnected-(U1-PA4-PadU3): U1.U3
unconnected-(U1-PA5-PadT3): U1.T3
unconnected-(U1-PA6-PadR3): U1.R3
unconnected-(U1-PA7-PadR5): U1.R5
unconnected-(U1-PA8-PadE15): U1.E15
unconnected-(U1-PA10-PadD14): U1.D14
unconnected-(U1-PA13-PadC15): U1.C15
unconnected-(U1-PA14-PadB14): U1.B14
unconnected-(U1-PB0-PadU5): U1.U5
unconnected-(U1-PB1-PadT5): U1.T5
unconnected-(U1-PB2-PadR6): U1.R6
unconnected-(U1-PB3-PadC6): U1.C6
unconnected-(U1-PB5-PadA5): U1.A5
unconnected-(U1-PB6-PadB5): U1.B5
unconnected-(U1-PB7-PadC5): U1.C5
unconnected-(U1-PB8-PadD5): U1.D5
unconnected-(U1-PB9-PadD4): U1.D4
unconnected-(U1-PB10-PadP11): U1.P11
unconnected-(U1-PB11-PadP12): U1.P12
unconnected-(U1-PB12-PadT14): U1.T14
unconnected-(U1-PB13-PadU14): U1.U14
unconnected-(U1-PB15-PadT15): U1.T15
unconnected-(U1-PC0-PadL2): U1.L2
unconnected-(U1-PC1-PadM2): U1.M2
unconnected-(U1-PC2-PadM3): U1.M3
unconnected-(U1-PC2_C-PadR1): U1.R1
unconnected-(U1-PC3-PadM4): U1.M4
unconnected-(U1-PC3_C-PadR2): U1.R2
unconnected-(U1-PC4-PadT4): U1.T4
unconnected-(U1-PC5-PadU4): U1.U4
unconnected-(U1-PC8-PadE13): U1.E13
unconnected-(U1-PC9-PadE14): U1.E14
unconnected-(U1-PC10-PadA13): U1.A13
unconnected-(U1-PC11-PadB13): U1.B13
unconnected-(U1-PC12-PadC12): U1.C12
unconnected-(U1-PC13-PadE3): U1.E3
unconnected-(U1-PC14-PadC2): U1.C2
unconnected-(U1-PC15-PadC1): U1.C1
unconnected-(U1-PD0-PadD13): U1.D13
unconnected-(U1-PD1-PadE12): U1.E12
unconnected-(U1-PD2-PadD12): U1.D12
unconnected-(U1-PD3-PadB12): U1.B12
unconnected-(U1-PD4-PadA12): U1.A12
unconnected-(U1-PD5-PadA11): U1.A11
unconnected-(U1-PD6-PadB11): U1.B11
unconnected-(U1-PD7-PadC11): U1.C11
unconnected-(U1-PD8-PadU16): U1.U16
unconnected-(U1-PD9-PadT17): U1.T17
unconnected-(U1-PD10-PadT16): U1.T16
unconnected-(U1-PD11-PadR15): U1.R15
unconnected-(U1-PD13-PadR17): U1.R17
unconnected-(U1-PD14-PadP16): U1.P16
unconnected-(U1-PD15-PadP15): U1.P15
unconnected-(U1-PE0-PadC4): U1.C4
unconnected-(U1-PE1-PadB4): U1.B4
unconnected-(U1-PE2-PadC3): U1.C3
unconnected-(U1-PE3-PadD3): U1.D3
unconnected-(U1-PE4-PadD2): U1.D2
unconnected-(U1-PE6-PadE5): U1.E5
unconnected-(U1-PE7-PadU9): U1.U9
unconnected-(U1-PE8-PadT9): U1.T9
unconnected-(U1-PE10-PadN9): U1.N9
unconnected-(U1-PE11-PadP10): U1.P10
unconnected-(U1-PE12-PadR10): U1.R10
unconnected-(U1-PE13-PadT10): U1.T10
unconnected-(U1-PE14-PadU10): U1.U10
unconnected-(U1-PE15-PadR11): U1.R11
unconnected-(U1-PF0-PadG4): U1.G4
unconnected-(U1-PF1-PadG3): U1.G3
unconnected-(U1-PF2-PadG1): U1.G1
unconnected-(U1-PF3-PadH4): U1.H4
unconnected-(U1-PF4-PadJ5): U1.J5
unconnected-(U1-PF5-PadJ4): U1.J4
unconnected-(U1-PF6-PadK2): U1.K2
unconnected-(U1-PF7-PadK3): U1.K3
unconnected-(U1-PF8-PadK4): U1.K4
unconnected-(U1-PF9-PadL4): U1.L4
unconnected-(U1-PF10-PadL3): U1.L3
unconnected-(U1-PF11-PadT7): U1.T7
unconnected-(U1-PF12-PadR7): U1.R7
unconnected-(U1-PF13-PadP7): U1.P7
unconnected-(U1-PF14-PadP8): U1.P8
unconnected-(U1-PF15-PadR9): U1.R9
unconnected-(U1-PG0-PadT8): U1.T8
unconnected-(U1-PG1-PadU8): U1.U8
unconnected-(U1-PG2-PadH16): U1.H16
unconnected-(U1-PG3-PadH15): U1.H15
unconnected-(U1-PG4-PadH14): U1.H14
unconnected-(U1-PG5-PadG14): U1.G14
unconnected-(U1-PG8-PadF15): U1.F15
unconnected-(U1-PG9-PadA10): U1.A10
unconnected-(U1-PG10-PadA9): U1.A9
unconnected-(U1-PG11-PadB9): U1.B9
unconnected-(U1-PG12-PadC9): U1.C9
unconnected-(U1-PG13-PadD9): U1.D9
unconnected-(U1-PG14-PadD8): U1.D8
unconnected-(U1-PG15-PadD6): U1.D6
unconnected-(U1-PH2-PadN2): U1.N2
unconnected-(U1-PH3-PadP2): U1.P2
unconnected-(U1-PH4-PadP3): U1.P3
unconnected-(U1-PH5-PadP4): U1.P4
unconnected-(U1-PH6-PadT11): U1.T11
unconnected-(U1-PH7-PadU13): U1.U13
unconnected-(U1-PH8-PadT13): U1.T13
unconnected-(U1-PH9-PadR13): U1.R13
unconnected-(U1-PH10-PadP13): U1.P13
unconnected-(U1-PH11-PadP14): U1.P14
unconnected-(U1-PH12-PadR14): U1.R14
unconnected-(U1-PH13-PadD16): U1.D16
unconnected-(U1-PH14-PadB17): U1.B17
unconnected-(U1-PH15-PadB16): U1.B16
unconnected-(U1-PI0-PadA16): U1.A16
unconnected-(U1-PI1-PadA15): U1.A15
unconnected-(U1-PI2-PadB15): U1.B15
unconnected-(U1-PI3-PadC14): U1.C14
unconnected-(U1-PI4-PadA4): U1.A4
unconnected-(U1-PI5-PadA3): U1.A3
unconnected-(U1-PI6-PadA2): U1.A2
unconnected-(U1-PI7-PadB3): U1.B3
unconnected-(U1-PI8-PadE4): U1.E4
unconnected-(U1-PI9-PadE2): U1.E2
unconnected-(U1-PI10-PadF3): U1.F3
unconnected-(U1-PI11-PadF4): U1.F4
unconnected-(U1-PI12-PadH1): U1.H1
unconnected-(U1-PI13-PadH2): U1.H2
unconnected-(U1-PI14-PadH3): U1.H3
unconnected-(U1-PI15-PadP5): U1.P5
unconnected-(U1-PJ0-PadN6): U1.N6
unconnected-(U1-PJ1-PadP6): U1.P6
unconnected-(U1-PJ2-PadT6): U1.T6
unconnected-(U1-PJ3-PadU6): U1.U6
unconnected-(U1-PJ4-PadU7): U1.U7
unconnected-(U1-PJ5-PadR12): U1.R12
unconnected-(U1-PJ6-PadN15): U1.N15
unconnected-(U1-PJ7-PadN14): U1.N14
unconnected-(U1-PJ8-PadN13): U1.N13
unconnected-(U1-PJ9-PadM14): U1.M14
unconnected-(U1-PJ10-PadL14): U1.L14
unconnected-(U1-PJ11-PadK14): U1.K14
unconnected-(U1-PJ12-PadD11): U1.D11
unconnected-(U1-PJ13-PadE10): U1.E10
unconnected-(U1-PJ14-PadD10): U1.D10
unconnected-(U1-PJ15-PadB10): U1.B10
unconnected-(U1-PK0-PadJ14): U1.J14
unconnected-(U1-PK1-PadJ15): U1.J15
unconnected-(U1-PK2-PadH17): U1.H17
unconnected-(U1-PK3-PadC8): U1.C8
unconnected-(U1-PK4-PadB8): U1.B8
unconnected-(U1-PK5-PadA8): U1.A8
unconnected-(U1-PK6-PadC7): U1.C7
unconnected-(U1-PK7-PadD7): U1.D7
unconnected-(U1-VFBSMPS-PadG2): U1.G2
unconnected-(U1-VLXSMPS-PadE1): U1.E1
USB_D_N: IC3.1 J2.A7 J2.B7 | length 10.7
  F.Cu w0.2: IC3.1 197.2,26.6 197.925,25.875 197.925,25.7 197.925,25.103 v3(197.725,24.903) ; J2.B7 199.628,20.1 199.579,20.149 199.579,21.051 199.628,21.1 J2.A7
  In1.Cu w0.2: v3(197.725,24.903) 197.925,24.703 197.925,22.237 198.908,21.254 198.915,21.247 199.38,20.782 v3(199.38,20.6)
USB_D_P: IC3.3 J2.A6 J2.B6 | length 11.9
  F.Cu w0.2: v3(198.575,24.903) 198.375,25.103 198.375,25.7 198.375,25.875 199.1,26.6 IC3.3 ; J2.A6 201.282,20.6 201.331,20.649 201.331,21.551 201.282,21.6 J2.B6
  In1.Cu w0.2: v3(198.575,24.903) 198.375,24.703 198.375,22.423 198.874,21.924 198.997,21.802 199.597,21.201 199.629,21.201 199.73,21.1 v3(201.53,21.1)
pads on no net: J2.Un1 J2.Un2

## Polygon pours and split planes (outlines as drawn)
GND on F.Cu "F.Cu-GND" (solid, remove dead copper, pour order 0): 167.55,41.6 166.65,0.4 210.25,0 210.15,41.45
GND on B.Cu "B.Cu-GND" (solid, remove dead copper, pour order 1): 167.55,41.6 166.65,0.4 210.25,0 210.15,41.45